# EAGLE board MicroRC-C (EAGLE 5.10), part 1 of 3
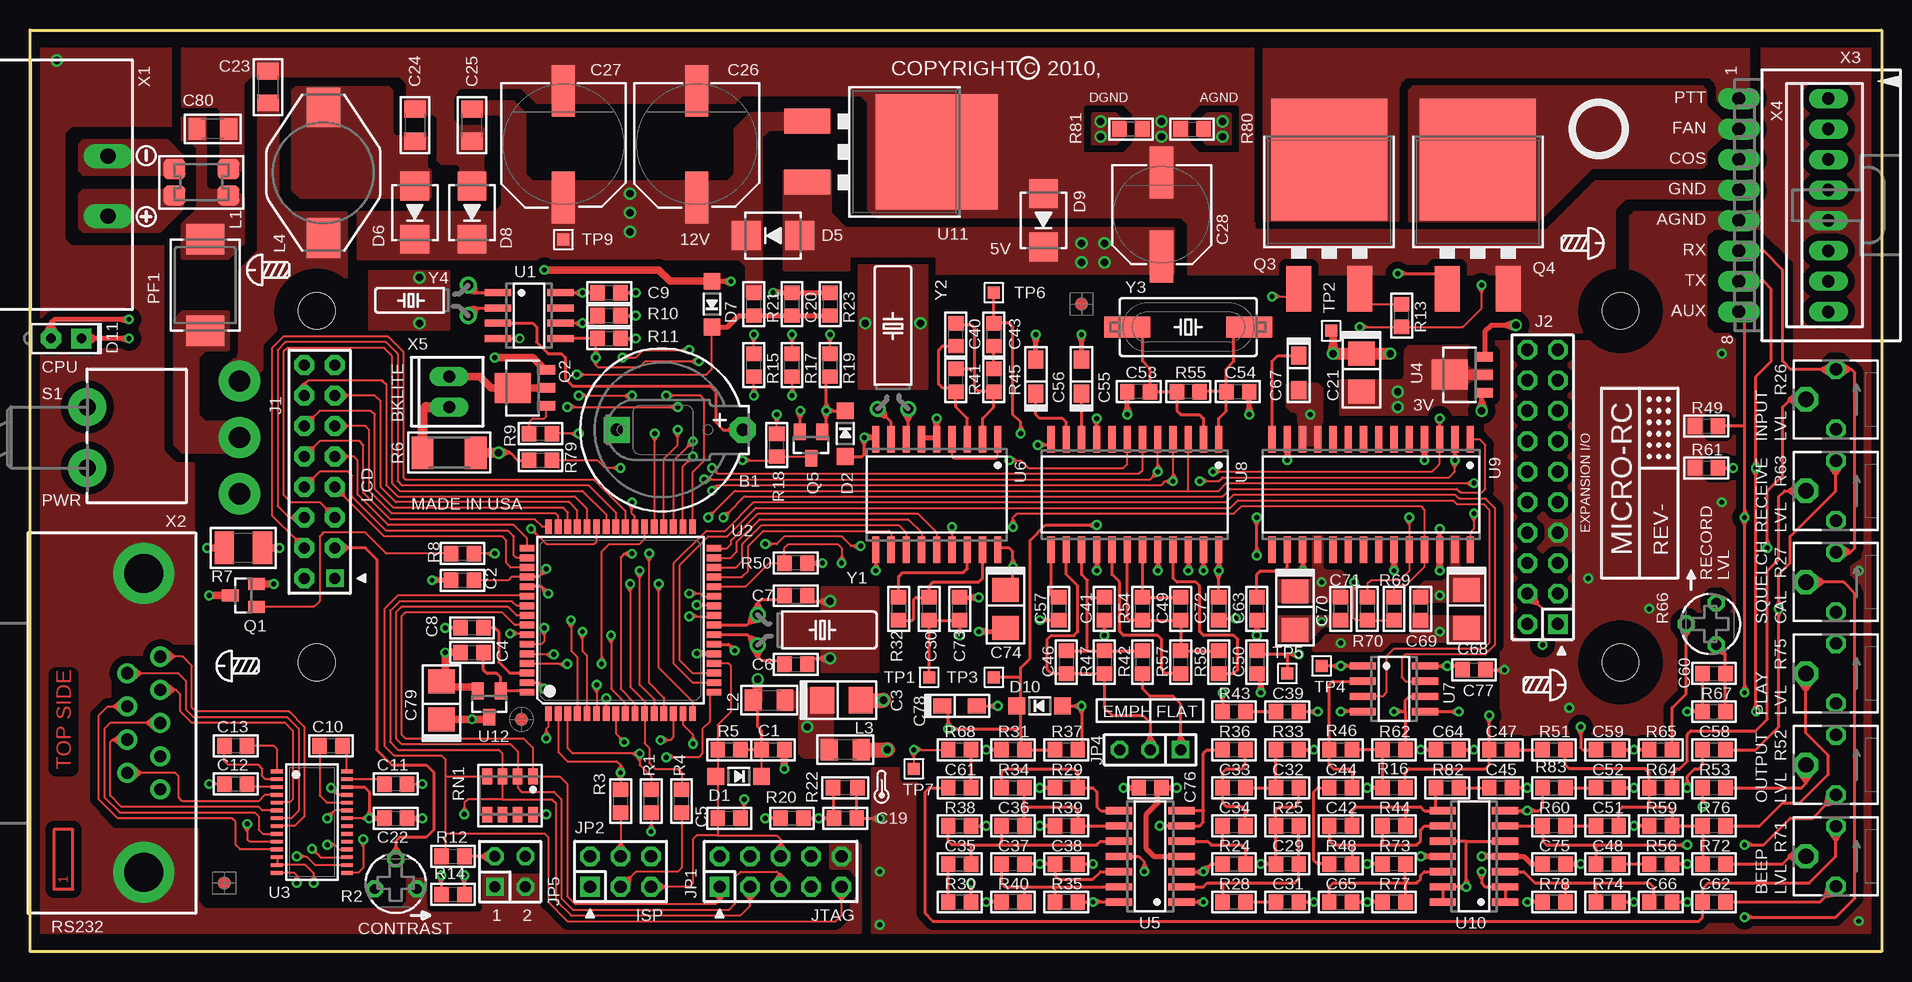
[diagram p0: board, top side]
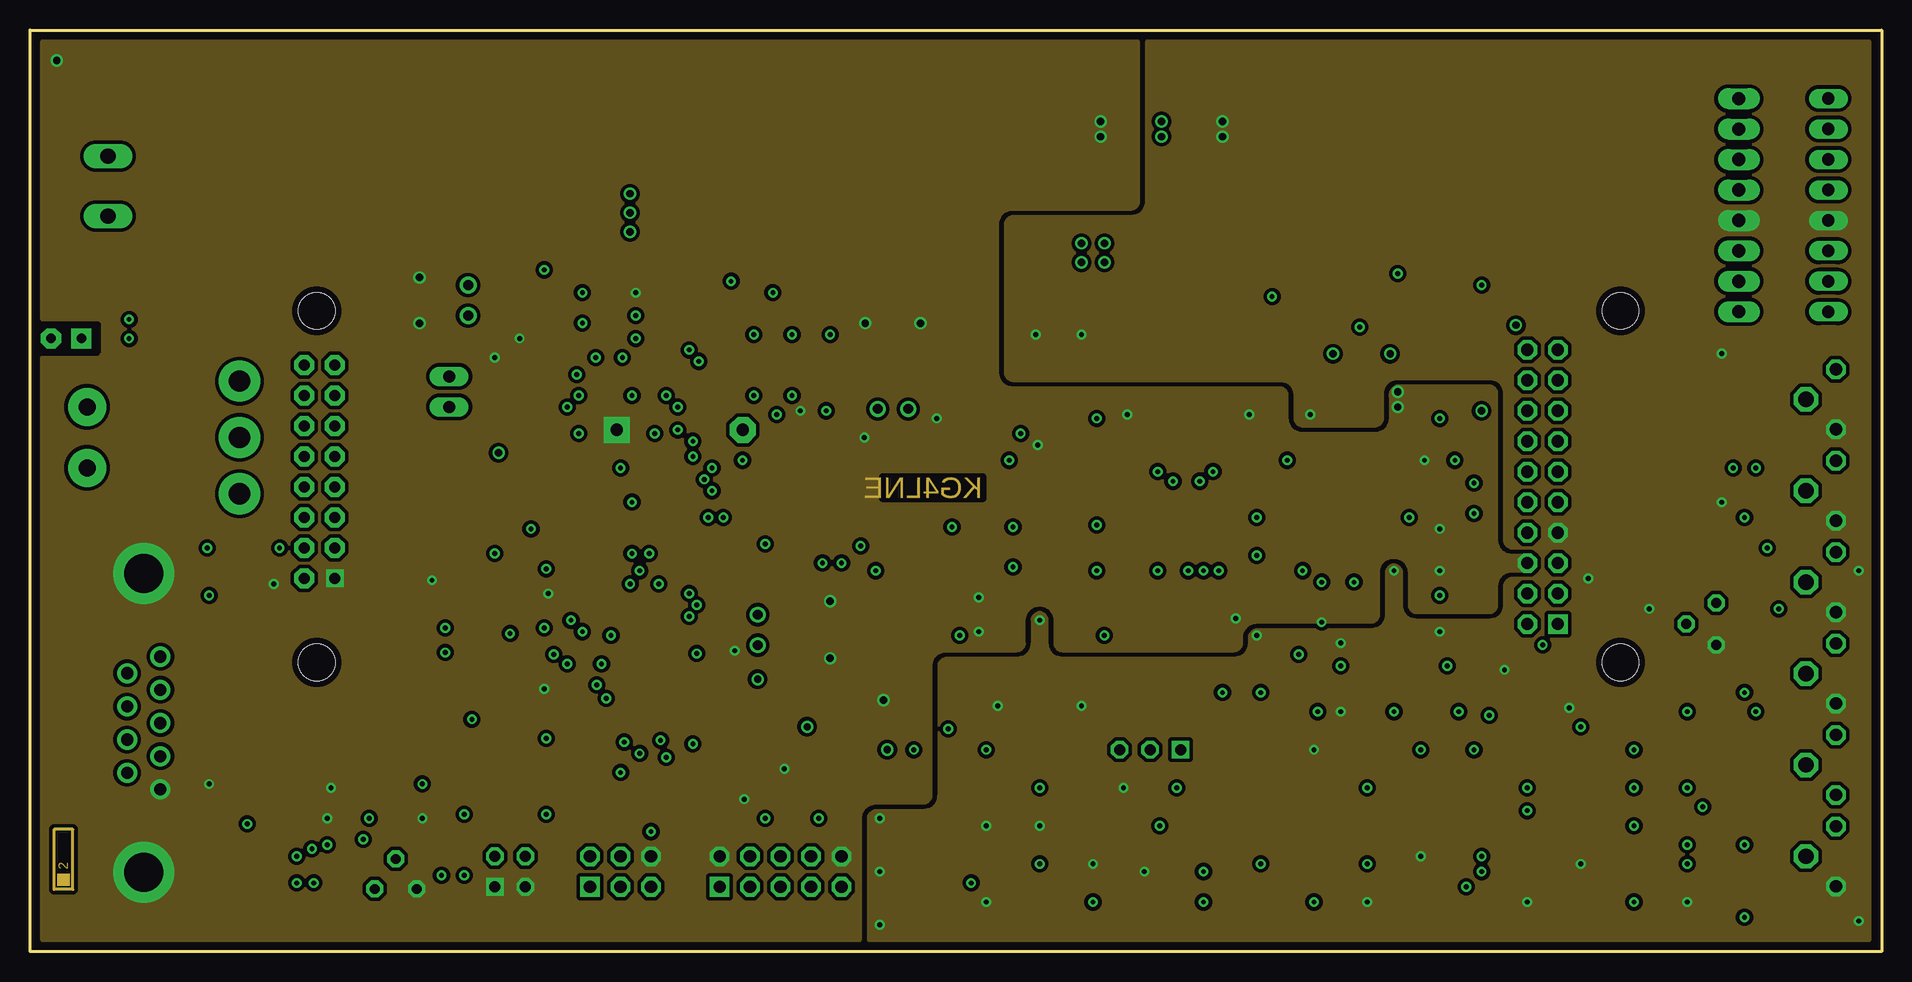
[diagram p1: board, inner layer GROUND]
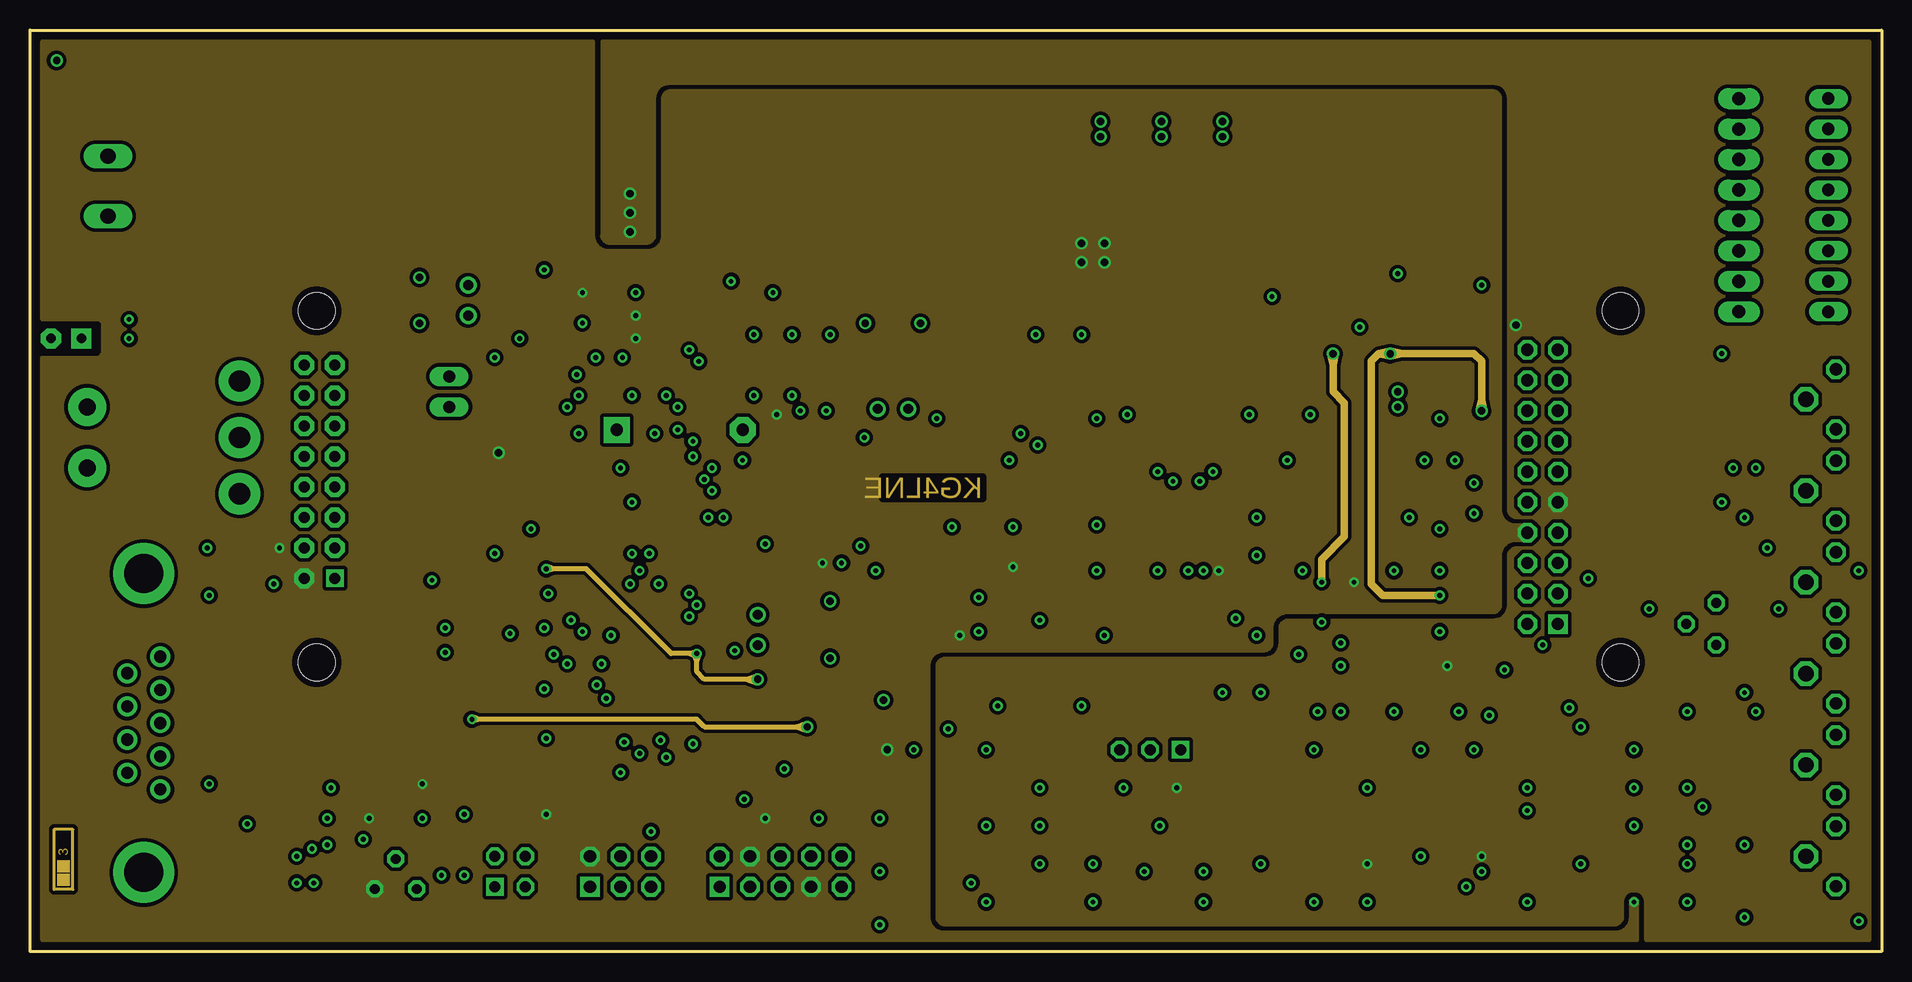
[diagram p2: board, inner layer SUPPLY]
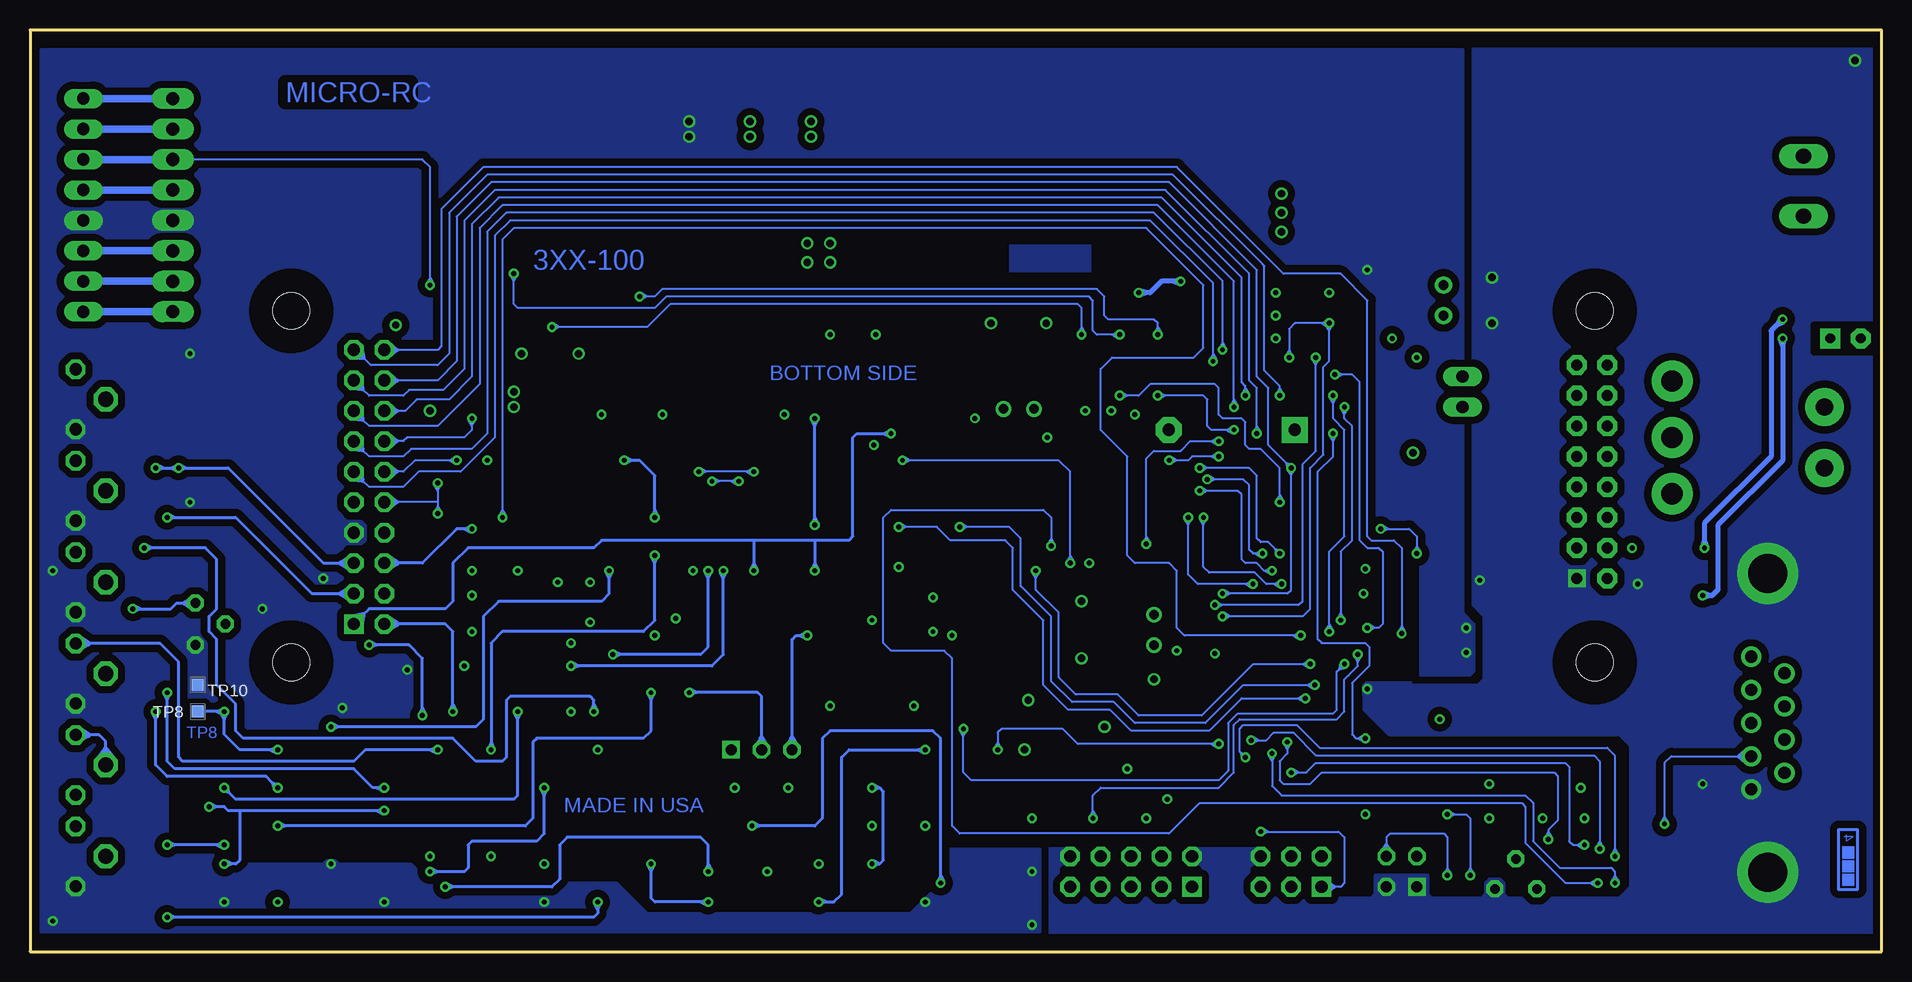
[diagram p3: board, bottom side, seen from below]

Size 154.31 x 76.83 mm. Coordinates in mm from the lower left corner, seen from the top.
Outline: 0,76.83 154.31,76.83 154.31,0 0,0 0,76.83
Copper layers (1*2+3*16): Top 0.035mm / dielectric 0.36mm / GROUND 0.035mm / dielectric 0.71mm / SUPPLY 0.035mm / dielectric 0.36mm / Bottom 0.035mm
Design rules "PRD_SN": minimum track width 2mil, minimum drill 16mil, track to track 8mil, track to pad 8mil, pad to pad 8mil, via to via 8mil, smd to smd 8mil, copper to edge 20mil, drill to drill 8mil, minimum pad ring 10mil, minimum via ring 8mil, stop-mask expansion 4mil, vias tented up to drill 32mil, thermal gap 24mil

## Footprints (pad centres in the part's own frame; a part is rotated, then mirrored left to right if it is on the bottom)
BR1225 = drill 1.016 pad 2.159 octagon: + 5.75,0 | drill 1.016 pad 2.159 square: - -4.75,0
C0805 = smd 1.2 x 1.3: 1 -0.953,0; 2 0.953,0
C3528/T = smd 2 x 2.2: + 1.587,0; - -1.587,0
C1206 = smd 1.4 x 1.8: 1 -1.329,0; 2 1.329,0
CSV-G = smd 4.318 x 1.93: + -4.445,0; - 4.445,0
CSV-E/F = smd 4.318 x 1.93: + -3.493,0; - 3.493,0
C3216/T = smd 1.5 x 1.27: + 1.429,0; - -1.429,0
SOD123 = smd 1.4 x 1.4: A 1.905,0; C -1.905,0
SMB = smd 2.4 x 2.4: A 2.223,0; C -2.223,0
LED535 = drill 0.813 pad 1.676 octagon: A -1.27,0 | drill 0.813 pad 1.676 square: K 1.27,0
DMC20261 = drill 0.914 pad 1.422 square: 1 2.54,-7.62 | drill 0.914 pad 1.676 octagon: 2 0,-7.62; 3 2.54,-5.08; 4 0,-5.08; 5 2.54,-2.54; 6 0,-2.54; 7 2.54,0; 8 0,0; 9 2.54,2.54; 10 0,2.54; 11 2.54,5.08; 12 0,5.08; 13 2.54,7.62; 14 0,7.62; 15 2.54,10.16; 16 0,10.16 | hole 3.048: 1.039,14.683; 1.039,-14.635; 109.674,-14.635; 109.674,14.682
MA10-2 = drill 1.016 square: 1 -11.43,-1.27 | drill 1.016 octagon: 2 -11.43,1.27; 3 -8.89,-1.27; 4 -8.89,1.27; 5 -6.35,-1.27; 6 -6.35,1.27; 7 -3.81,-1.27; 8 -3.81,1.27; 9 -1.27,-1.27; 10 -1.27,1.27; 11 1.27,-1.27; 12 1.27,1.27; 13 3.81,-1.27; 14 3.81,1.27; 15 6.35,-1.27; 16 6.35,1.27; 17 8.89,-1.27; 18 8.89,1.27; 19 11.43,-1.27; 20 11.43,1.27
AVR-JTAG-10 = drill 1.016 square: 1 -5.08,-1.27 | drill 1.016 octagon: 2 -5.08,1.27; 3 -2.54,-1.27; 4 -2.54,1.27; 5 0,-1.27; 6 0,1.27; 7 2.54,-1.27; 8 2.54,1.27; 9 5.08,-1.27; 10 5.08,1.27
AVR-ISP-6 = drill 1.016 square: 1 -2.54,-1.27 | drill 1.016 octagon: 2 -2.54,1.27; 3 0,-1.27; 4 0,1.27; 5 2.54,-1.27; 6 2.54,1.27
JP2 = drill 0.914 square: 1 -2.54,0 | drill 0.914 octagon: 2 0,0; 3 2.54,0
JP2Q = drill 0.914 square: 1 -1.27,-1.27 | drill 0.914 octagon: 2 -1.27,1.27; 3 1.27,-1.27; 4 1.27,1.27
CM1812 = smd 1.841 x 1.689: 1 -2.25,1.1; 2 -2.25,-1.1; 3 2.25,-1.1; 4 2.25,1.1
L1206 = smd 1.4 x 1.8: 1 -1.329,0; 2 1.329,0
PM-13 = smd 3.302 x 2.794: 1 -5.447,0; 2 5.447,0
SMD-7555 = smd 2.54 x 3.175: 1 -3.81,0; 2 3.81,0
SOT23@1 = smd 1 x 1.4: 1 -0.95,-1.1; 2 0.95,-1.1; 3 0,1.1
SOT89 = smd 0.8 x 1.5: 1 -1.5,-1.75; 2 0,-1.75; 3 1.5,-1.75 | smd 2.5 x 3: 4 0,1.05
D2PAK = smd 2.08 x 3.81: 1 -2.54,-8.255; 3 2.54,-8.255 | smd 9.652 x 10.16: 2 0,2.54
R0805 = smd 1.2 x 1.3: 1 -0.953,0; 2 0.953,0
EVM-L4G = drill 0.813 pad 1.422 octagon: 1 -1.75,-0.5; 2 0,2; 3 1.75,-0.5
R2010 = smd 1.8 x 2.7: 1 -2.223,0; 2 2.223,0
R1210 = smd 1.6 x 2.7: 1 -1.587,0; 2 1.587,0
R0805' = smd 1.2 x 1.3: 1 -1.016,0; 2 1.016,0
EVME-SIDE = drill 1.016 octagon: 1 -2.5,0; 3 2.5,0 | drill 1.27 octagon: 2 0,2.5
744-8 = smd 0.8 x 1.3: 1 -1.905,-1.587; 2 -0.635,-1.587; 3 0.635,-1.587; 4 1.905,-1.587; 5 1.905,1.587; 6 0.635,1.587; 7 -0.635,1.587; 8 -1.905,1.587
CK-A = drill 1.778 pad 3.429 round: 1 8.89,-4.699; 2 8.89,0; 3 8.89,4.699 | drill 1.422 pad 3.175 round: B1 -3.81,-2.54; B2 -3.81,2.54
TP10SQ = smd 1 x 1: TP 0,0
SMD-10SN = smd 1 x 1: TP 0,0
SO08 = smd 0.6 x 2.2: 1 -1.905,-2.6; 2 -0.635,-2.6; 3 0.635,-2.6; 4 1.905,-2.6; 5 1.905,2.6; 6 0.635,2.6; 7 -0.635,2.6; 8 -1.905,2.6
TQFP64-AEB = smd 1.194 x 0.559: 1 -7.8,6; 2 -7.8,5.2; 3 -7.8,4.4; 4 -7.8,3.6; 5 -7.8,2.8; 6 -7.8,2; 7 -7.8,1.2; 8 -7.8,0.4; 9 -7.8,-0.4; 10 -7.8,-1.2; 11 -7.8,-2; 12 -7.8,-2.8; 13 -7.8,-3.6; 14 -7.8,-4.4; 15 -7.8,-5.2; 16 -7.8,-6; 33 7.8,-6; 34 7.8,-5.2; 35 7.8,-4.4; 36 7.8,-3.6; 37 7.8,-2.8; 38 7.8,-2; 39 7.8,-1.2; 40 7.8,-0.4; 41 7.8,0.4; 42 7.8,1.2; 43 7.8,2; 44 7.8,2.8; 45 7.8,3.6; 46 7.8,4.4; 47 7.8,5.2; 48 7.8,6 | smd 0.559 x 1.194: 17 -6,-7.8; 18 -5.2,-7.8; 19 -4.4,-7.8; 20 -3.6,-7.8; 21 -2.8,-7.8; 22 -2,-7.8; 23 -1.2,-7.8; 24 -0.4,-7.8; 25 0.4,-7.8; 26 1.2,-7.8; 27 2,-7.8; 28 2.8,-7.8; 29 3.6,-7.8; 30 4.4,-7.8; 31 5.2,-7.8; 32 6,-7.8; 49 6,7.8; 50 5.2,7.8; 51 4.4,7.8; 52 3.6,7.8; 53 2.8,7.8; 54 2,7.8; 55 1.2,7.8; 56 0.4,7.8; 57 -0.4,7.8; 58 -1.2,7.8; 59 -2,7.8; 60 -2.8,7.8; 61 -3.6,7.8; 62 -4.4,7.8; 63 -5.2,7.8; 64 -6,7.8
TSSOP28 = smd 0.305 x 0.991: 1 -4.225,-2.918; 2 -3.575,-2.918; 3 -2.925,-2.918; 4 -2.275,-2.918; 5 -1.625,-2.918; 6 -0.975,-2.918; 7 -0.325,-2.918; 8 0.325,-2.918; 9 0.975,-2.918; 10 1.625,-2.918; 11 2.275,-2.918; 12 2.925,-2.918; 13 3.575,-2.918; 14 4.225,-2.918; 15 4.225,2.918; 16 3.575,2.918; 17 2.925,2.918; 18 2.275,2.918; 19 1.625,2.918; 20 0.975,2.918; 21 0.325,2.918; 22 -0.325,2.918; 23 -0.975,2.918; 24 -1.625,2.918; 25 -2.275,2.918; 26 -2.925,2.918; 27 -3.575,2.918; 28 -4.225,2.918
SOT89-4 = smd 0.8 x 1.5: 1 -1.5,-1.75; 2 0,-1.75; 3 1.5,-1.75 | smd 2.5 x 3: 4 0,1.05
SO14 = smd 0.6 x 2.2: 1 -3.81,-2.6; 2 -2.54,-2.6; 3 -1.27,-2.6; 4 0,-2.6; 5 1.27,-2.6; 6 2.54,-2.6; 7 3.81,-2.6; 8 3.81,2.6; 9 2.54,2.6; 10 1.27,2.6; 11 0,2.6; 12 -1.27,2.6; 13 -2.54,2.6; 14 -3.81,2.6
SO18W = smd 0.6 x 2.2: 1 -5.08,-4.6; 2 -3.81,-4.6; 3 -2.54,-4.6; 4 -1.27,-4.6; 5 0,-4.6; 6 1.27,-4.6; 7 2.54,-4.6; 8 3.81,-4.6; 9 5.08,-4.6; 10 5.08,4.6; 11 3.81,4.6; 12 2.54,4.6; 13 1.27,4.6; 14 0,4.6; 15 -1.27,4.6; 16 -2.54,4.6; 17 -3.81,4.6; 18 -5.08,4.6
SO24W = smd 0.6 x 2.2: 1 -6.985,-4.6; 2 -5.715,-4.6; 3 -4.445,-4.6; 4 -3.175,-4.6; 5 -1.905,-4.6; 6 -0.635,-4.6; 7 0.635,-4.6; 8 1.905,-4.6; 9 3.175,-4.6; 10 4.445,-4.6; 11 5.715,-4.6; 12 6.985,-4.6; 13 6.985,4.6; 14 5.715,4.6; 15 4.445,4.6; 16 3.175,4.6; 17 1.905,4.6; 18 0.635,4.6; 19 -0.635,4.6; 20 -1.905,4.6; 21 -3.175,4.6; 22 -4.445,4.6; 23 -5.715,4.6; 24 -6.985,4.6
SO28W = smd 0.6 x 2.2: 1 -8.255,-4.6; 2 -6.985,-4.6; 3 -5.715,-4.6; 4 -4.445,-4.6; 5 -3.175,-4.6; 6 -1.905,-4.6; 7 -0.635,-4.6; 8 0.635,-4.6; 9 1.905,-4.6; 10 3.175,-4.6; 11 4.445,-4.6; 12 5.715,-4.6; 13 6.985,-4.6; 14 8.255,-4.6; 15 8.255,4.6; 16 6.985,4.6; 17 5.715,4.6; 18 4.445,4.6; 19 3.175,4.6; 20 1.905,4.6; 21 0.635,4.6; 22 -0.635,4.6; 23 -1.905,4.6; 24 -3.175,4.6; 25 -4.445,4.6; 26 -5.715,4.6; 27 -6.985,4.6; 28 -8.255,4.6
SOT23 = smd 1 x 1.4: 1 -0.95,-1.1; 2 0.95,-1.1; 3 0,1.1
951-2 = drill 1.27 pad 1.93 long: 1 -2.5,0; 2 2.5,0
NC182M9 = drill 1.016 pad 1.676 round: 1 -5.537,2.769; 2 -2.769,2.769; 3 0,2.769; 4 2.769,2.769; 5 5.537,2.769; 6 -4.153,0; 7 -1.384,0; 8 1.384,0; 9 4.153,0 | drill 3.251 pad 5.08 round: G1 12.459,1.384; G2 -12.459,1.384
70553-08 = drill 1.092 long: 1 -8.89,-7.62; 2 -6.35,-7.62; 3 -3.81,-7.62; 4 -1.27,-7.62; 5 1.27,-7.62; 6 3.81,-7.62; 7 6.35,-7.62; 8 8.89,-7.62
MTA08-100 = drill 1.016 long: 1 8.89,0; 2 6.35,0; 3 3.81,0; 4 1.27,0; 5 -1.27,0; 6 -3.81,0; 7 -6.35,0; 8 -8.89,0
MTA-100-2V = drill 1.016 long: 1 -1.27,0; 2 1.27,0
TC38H = drill 0.813 round: 1 -1.27,0; 2 1.27,0
TC310H = drill 0.813 round: 1 -1.27,0; 2 1.27,0
SM49 = smd 3.81 x 1.778: 1 -5.08,0; 2 5.08,0
TC26H = drill 0.813 pad 1.422 round: 1 -1.27,0; 2 1.27,0

## Placement (x,y rotation side)
B1  BR1225A/HB  [BR1225]  53.66,43.5 0 top
C1  1uF  [C0805]  61.91,16.83 0 top
C2  0.1uF  [C0805]  36.04,30.96 180 top
C3  10uF  [C3528/T]  67.63,20.95 180 top
C4  10uF  [C0805]  36.83,24.92 0 top
C5  0.01uF  [C0805]  58.26,11.11 0 top
C6  22pF  [C0805]  63.82,23.95 0 top
C7  22pF  [C0805]  63.82,29.67 0 top
C8  0.1uF  [C0805]  36.83,26.99 180 top
C9  0.1uF  [C0805]  48.26,54.93 0 top
C10  0.1uF  [C0805]  25.08,17.14 180 top
C11  0.47uF  [C0805]  30.48,13.97 180 top
C12  0.47uF  [C0805]  17.14,13.97 0 top
C13  0.47uF  [C0805]  17.14,17.14 180 top
C19  0.1uF  [C0805]  67.94,11.11 0 top
C20  0.1uF  [C0805]  63.5,53.97 90 top
C21  10uF  [C3528/T]  110.97,48.26 90 top
C22  1uF  [C0805]  30.48,11.11 0 top
C23  0.1uF  [C1206]  19.84,72.07 90 top
C24  0.1uF  [C1206]  32.07,68.9 90 top
C25  0.1uF  [C1206]  36.83,68.9 270 top
C26  470uF  [CSV-G]  55.56,67.31 90 top
C27  470uF  [CSV-G]  44.45,67.31 90 top
C28  100uF  [CSV-E/F]  94.3,61.44 90 top
C29  100pF  [C0805]  104.78,7.3 180 top
C30  0.1uF  [C0805]  74.93,28.57 270 top
C31  0.1uF  [C0805]  104.78,4.13 180 top
C32  1500pF  [C0805]  104.78,13.65 180 top
C33  1500pF  [C0805]  100.33,13.65 180 top
C34  1500pF  [C0805]  100.33,10.48 180 top
C35  0.047uF  [C0805]  77.47,7.3 0 top
C36  470pF  [C0805]  81.92,10.48 0 top
C37  470pF  [C0805]  81.92,7.3 180 top
C38  0.047uF  [C0805]  86.36,7.3 180 top
C39  1uF  [C0805]  104.78,20 0 top
C40  0.001uF  [C0805]  77.15,51.43 90 top
C41  0.0068uF  [C0805]  89.53,28.57 270 top
C42  1500pF  [C0805]  109.22,10.48 0 top
C43  0.1uF  [C0805]  80.33,51.43 270 top
C44  1uF  [C0805]  109.22,13.65 180 top
C45  1uF  [C0805]  122.56,13.65 0 top
C46  100pF  [C0805]  86.36,24.13 270 top
C47  1uF  [C0805]  122.56,16.83 0 top
C48  560pF  [C0805]  131.44,7.3 0 top
C49  100pF  [C0805]  95.89,28.57 90 top
C50  1uF  [C0805]  102.23,24.13 270 top
C51  10uF  [C0805]  131.44,10.48 180 top
C52  1uF  [C0805]  131.44,13.65 0 top
C53  33pF  [C0805]  92.39,46.67 180 top
C54  33pF  [C0805]  100.65,46.67 0 top
C55  0.1uF  [C3216/T]  87.63,47.94 270 top
C56  2.2uF  [C3216/T]  83.82,47.94 270 top
C57  0.1uF  [C0805]  85.72,28.57 270 top
C58  1uF  [C0805]  140.34,16.83 0 top
C59  1uF  [C0805]  131.44,16.83 180 top
C60  4700pF  [C0805]  140.34,23.18 0 top
C61  1uF  [C0805]  77.47,13.65 180 top
C62  0.001uF  [C0805]  140.34,4.13 0 top
C63  0.1uF  [C0805]  102.23,28.57 90 top
C64  1uF  [C0805]  118.11,16.83 0 top
C65  1uF  [C0805]  109.22,4.13 0 top
C66  1uF  [C0805]  135.89,4.13 0 top
C67  1uF  [C3216/T]  105.73,48.26 90 top
C68  22uF  [C3528/T]  119.7,28.57 90 top
C69  0.1uF  [C0805]  115.89,28.57 270 top
C70  22uF  [C3528/T]  105.41,28.42 90 top
C71  0.1uF  [C0805]  109.22,28.57 270 top
C72  0.1uF  [C0805]  99.06,28.57 270 top
C73  0.1uF  [C0805]  77.47,28.57 90 top
C74  22uF  [C3528/T]  81.28,28.57 90 top
C75  0.1uF  [C0805]  127,7.3 0 top
C76  0.1uF  [C0805]  93.34,13.65 180 top
C77  0.1uF  [C0805]  120.33,23.49 0 top
C78  0.1uF  [C3216/T]  77.47,20.48 180 top
C79  10uF  [C3528/T]  34.29,20.96 270 top
C80  0.01uF  [C1206]  15.24,68.58 0 top
D1  BAV16W-7-F  [SOD123]  59.05,14.6 180 top
D2  5.1V  [SOD123]  67.94,43.18 270 top
D5  S1GB-13  [SMB]  61.91,59.69 0 top
D6  S1GB-13  [SMB]  32.07,61.59 90 top
D7  BZT52C5V1-7-F  [SOD123]  56.83,53.97 90 top
D8  18V  [SMB]  36.83,61.59 90 top
D9  S1GB-13  [SMB]  84.45,60.96 90 top
D10  BZT52C5V1-7-F  [SOD123]  84.14,20.48 0 top
D11  RED  [LED535]  3.02,51.12 0 top
FIDUCIAL1  FIDUCIAL-G10S  [G10S]  16.19,5.71 0 top
FIDUCIAL2  FIDUCIAL-G10S  [G10S]  87.63,53.97 0 top
FIDUCIAL3  FIDUCIAL-G10  [G10]  40.96,19.37 0 top
J1  DMC20261  [DMC20261]  22.86,38.73 0 top
J2  [MA10-2]  126.05,38.73 90 top
JP1  AVR-JTAG-10  [AVR-JTAG-10]  62.55,6.67 0 top
JP2  AVR-ISP-6  [AVR-ISP-6]  49.21,6.67 0 top
JP4  [JP2]  93.34,16.83 180 top
JP5  [JP2Q]  40.01,6.67 0 top
L1  CM1812  [CM1812]  14.29,64.13 0 top
L2  0.1uH  [L1206]  61.59,20.95 180 top
L3  FB-M1331  [L1206]  67.94,16.83 0 top
L4  10uH  [PM-13]  24.45,64.93 90 top
PF1  MF-SM030-2  [SMD-7555]  14.61,55.56 270 top
Q1  MMBTA05LT1G  [SOT23@1]  17.78,29.69 90 top
Q2  ZXMN6A07Z  [SOT89]  41.27,46.99 90 top
Q3  IRF614SPBF  [D2PAK]  108.27,63.5 0 top
Q4  IRF614SPBF  [D2PAK]  120.65,63.5 0 top
Q5  MMBTA05LT1G  [SOT23@1]  65.09,42.23 180 top
R1  47.5R  [R0805]  51.75,12.54 90 top
R2  10K  [EVM-L4G]  30.48,5.71 0 top
R3  47.5R  [R0805]  49.21,12.54 90 top
R4  47.5R  [R0805]  54.29,12.54 90 top
R5  10K  [R0805]  58.26,16.83 0 top
R6  48.7R  [R2010]  34.92,41.59 180 top
R7  464R  [R1210]  17.78,33.65 180 top
R8  4.75K  [R0805]  36.04,33.18 180 top
R9  4.75K  [R0805]  42.55,43.18 180 top
R10  10K  [R0805]  48.26,53.02 0 top
R11  10K  [R0805]  48.26,51.12 0 top
R12  47.5R  [R0805]  35.24,7.94 0 top
R13  100K  [R0805]  114.3,53.02 90 top
R14  47.5R  [R0805]  35.24,4.76 0 top
R15  4.75K  [R0805]  60.33,48.89 90 top
R16  1M  [R0805]  113.67,13.65 180 top
R17  4.75K  [R0805]  63.5,48.89 90 top
R18  10K  [R0805]  62.23,42.23 90 top
R19  4.75K  [R0805]  66.67,48.89 90 top
R20  100K  [R0805]  63.5,11.11 180 top
R21  62K  [R0805]  60.33,53.97 90 top
R22  NCP21WF104J03RA  [R0805']  67.94,13.65 180 top
R23  22K  [R0805]  66.67,53.97 270 top
R24  91.0K  [R0805]  100.33,7.3 0 top
R25  10K  [R0805]  104.78,10.48 180 top
R26  10K  [EVME-SIDE]  150.5,46.04 90 top
R27  10K  [EVME-SIDE]  150.5,30.8 90 top
R28  10K  [R0805]  100.33,4.13 180 top
R29  332K  [R0805]  86.36,13.65 0 top
R30  4.75K  [R0805]  77.47,4.13 0 top
R31  22K  [R0805]  81.92,16.83 180 top
R32  301K  [R0805]  72.39,28.57 270 top
R33  4.75K  [R0805]  104.78,16.83 180 top
R34  100K  [R0805]  81.92,13.65 0 top
R35  150K  [R0805]  86.36,4.13 180 top
R36  5.62K  [R0805]  100.33,16.83 180 top
R37  100K  [R0805]  86.36,16.83 0 top
R38  8.25K  [R0805]  77.47,10.48 0 top
R39  10K  [R0805]  86.36,10.48 180 top
R40  10K  [R0805]  81.92,4.13 180 top
R41  100K  [R0805]  77.15,47.62 90 top
R42  11.3K  [R0805]  92.71,24.13 270 top
R43  10K  [R0805]  100.33,20 0 top
R44  22K  [R0805]  113.67,10.48 0 top
R45  100K  [R0805]  80.33,47.62 270 top
R46  1M  [R0805]  109.22,16.83 0 top
R47  93.1K  [R0805]  89.53,24.13 270 top
R48  22K  [R0805]  109.22,7.3 0 top
R49  100K  [R0805]  139.7,43.81 0 top
R50  10K  [R0805]  63.82,32.38 180 top
R51  22K  [R0805]  127,16.83 0 top
R52  200K  [EVME-SIDE]  150.5,15.56 90 top
R53  33.2K  [R0805]  140.34,13.65 180 top
R54  10K  [R0805]  92.71,28.57 90 top
R55  1M  [R0805]  96.52,46.67 180 top
R56  10K  [R0805]  135.89,7.3 0 top
R57  10K  [R0805]  95.89,24.13 90 top
R58  10K  [R0805]  99.06,24.13 90 top
R59  22K  [R0805]  135.89,10.48 0 top
R60  33.2K  [R0805]  127,10.48 180 top
R61  100K  [R0805]  139.7,40.32 0 top
R62  1M  [R0805]  113.67,16.83 180 top
R63  10K  [EVME-SIDE]  150.5,38.42 90 top
R64  22K  [R0805]  135.89,13.65 180 top
R65  10K  [R0805]  135.89,16.83 0 top
R66  10K  [EVM-L4G]  140.02,27.3 90 top
R67  10K  [R0805]  140.34,20 0 top
R68  100K  [R0805]  77.47,16.83 0 top
R69  10K  [R0805]  113.67,28.57 270 top
R70  10K  [R0805]  111.44,28.57 270 top
R71  10K  [EVME-SIDE]  150.5,7.94 90 top
R72  22K  [R0805]  140.34,7.3 0 top
R73  100K  [R0805]  113.67,7.3 180 top
R74  100K  [R0805]  131.44,4.13 0 top
R75  10K  [EVME-SIDE]  150.5,23.18 90 top
R76  22K  [R0805]  140.34,10.48 180 top
R77  100K  [R0805]  113.67,4.13 0 top
R78  100K  [R0805]  127,4.13 0 top
R79  10K  [R0805]  42.55,40.96 180 top
R80  0R  [R0805]  96.84,68.58 0 top
R81  0R  [R0805]  91.76,68.58 180 top
R82  1.00K  [R0805]  118.11,13.65 0 top
R83  1.00K  [R0805]  127,13.65 0 top
RN1  10K  [744-8]  40.01,13.02 180 top
S1  CK-A  [CK-A]  8.57,42.86 0 top
TP1  TPTP10SQ  [TP10SQ]  74.93,22.86 270 top
TP2  TPTP10SQ  [TP10SQ]  108.43,51.75 180 top
TP3  TPTP10SQ  [TP10SQ]  80.33,22.86 270 top
TP4  TPTP10SQ  [TP10SQ]  107.63,23.81 90 top
TP5  TPTP10SQ  [TP10SQ]  104.78,23.18 90 top
TP6  TPTP10SQ  [TP10SQ]  80.33,54.93 90 top
TP7  TPTP10SQ  [TP10SQ]  73.66,15.24 270 top
TP8  TPS-SMD-10SN  [SMD-10SN]  140.34,20 180 bottom
TP9  TPTP10SQ  [TP10SQ]  44.45,59.37 0 top
TP10  TPS-SMD-10SN  [SMD-10SN]  140.34,22.22 180 bottom
U1  DS1307Z  [SO08]  41.59,53.02 270 top
U2  MEGA1281/2561  [TQFP64-AEB]  49.21,27.62 90 top
U3  MAX3243IPWR  [TSSOP28]  23.5,10.79 270 top
U4  L78L33ACUTR  [SOT89-4]  119.38,48.1 90 top
U5  LM324D  [SO14]  93.34,7.94 90 top
U6  CM8870CS  [SO18W]  75.56,38.1 180 top
U7  MAX323CSA  [SO08]  113.67,21.91 270 top
U8  MX828DW  [SO24W]  92.08,38.1 180 top
U9  ISD4002S  [SO28W]  111.76,38.1 180 top
U10  TL084D  [SO14]  120.33,7.94 90 top
U11  L7805ACD2T  [D2PAK]  73.03,66.67 270 top
U12  AD158X  [SOT23]  38.26,20.64 180 top
U$6  [ICON_ATTR_COPYRIGHT]  71.75,73.02 0 top
U$7  [LAYER_CHECK-4]  3.17,5.71 90 top
U$60  [FIELD_ATTR_DATECODE5_RESTRICT]  72.07,57.15 0 bottom
U$74  [ICON_SIDE_BOTTOM]  92.71,47.62 0 top
U$75  [ICON_SIDE_TOP]  3.43,15.18 90 top
U$100  [ICON_ATTR_REV-M]  130.81,68.58 0 top
U$112  [ICON_TEMP]  70.96,13.02 0 top
U$123  [ICON_MINUS]  9.68,66.36 90 top
U$125  [ICON_PLUS]  9.68,61.28 0 top
U$133  [ICON_MSCREW-S]  129.86,59.05 270 top
U$230  [ICON_PIN1_B]  127.64,25.4 270 top
U$235  [ICON_PIN1_B]  27.3,31.11 0 top
U$239  [ICON_MSCREW-S]  126.68,22.22 270 top
U$240  [ICON_ARROW-T]  33.34,3.02 270 top
U$241  [ICON_ARROW-T]  138.43,31.75 0 top
U$280  [ICON_PIN1_B]  46.67,3.49 270 top
U$281  [ICON_PIN1_B]  57.47,3.49 270 top
U$282  [ICON_MSCREW-S]  16.83,23.81 90 top
U$283  [ICON_MSCREW-S]  19.37,56.83 90 top
X1  EDSTLZ951/2  [951-2]  6.51,63.82 270 top
X2  182-009-112-531  [NC182M9]  8.1,19.05 270 top
X3  70553-0007  [70553-08]  150.02,62.23 270 top
X4  640454-8  [MTA08-100]  149.86,62.23 90 top
X5  640454-2  [MTA-100-2V]  34.92,46.67 90 top
Y1  16.000 MHz  [TC38H]  60.64,26.81 270 top
Y2  3.579 MHZ  [TC310H]  71.91,45.24 0 top
Y3  4.032MHZ  [SM49]  96.52,52.07 0 top
Y4  32.678 kHz  [TC26H]  36.51,54.29 90 top

## Library data of the parts
B1 = battery; DNP: T; PARTNO: BR1225A/HB; PLACE: INSTALL ON PURCHASE
C1 C22 C39 C44 C45 C47 C50 C52 C58 C59 C61 C64-C66 = rc-master; PARTNO: C0805C105Z3VACTU
C2 C8-C10 C19 C20 C30 C31 C43 C57 C63 C69 C71-C73 C75-C77 = rc-master; PARTNO: C0805F104K5RACTU
C3 C21 C79 = rc-master; PARTNO: T491B106M016AT; TYPE: TANT; VOLT: 16V
C4 C51 = rc-master; PARTNO: C0805C106K9PACTU
C5 = rc-master; PARTNO: C0805C103K5RACTU
C6 C7 = rc-master; PARTNO: C0805C220J5GACTU
C11-C13 = rc-master; PARTNO: C0805F474K3RACTU
C23-C25 = rc-master; PARTNO: C1206C104K5RACTU
C26 C27 = rc-master; PARTNO: EEE-1EA471P; VOLT: 25V
C28 = rc-master; PARTNO: EEE-1CA101P; VOLT: 16V
C29 C46 C49 = rc-master; PARTNO: C0805C101J5GACTU
C32-C34 C42 = rc-master; PARTNO: C0805C152K5RACTU
C35 C38 = rc-master; PARTNO: C0805C473K5RACTU
C36 C37 = rc-master; PARTNO: C0805C471J5GACTU
C40 C62 = rc-master; PARTNO: C0805C102K5RACTU
C41 = rc-master; PARTNO: C0805C682K5RACTU
C48 = rc-master; PARTNO: C0805C561J5GACTU
C53 C54 = rc-master; PARTNO: C0805C330J5GACTU
C55 = rc-master; PARTNO: T491A104K035AT
C56 = rc-master; PARTNO: T491A225K010AT
C60 = rc-master; PARTNO: C0805C472K5RACTU
C67 = rc-master; PARTNO: T491A105K016AT; TYPE: TANT
C68 C70 C74 = rc-master; PARTNO: T491B226M016AT; TYPE: TANT
C78 = rc-master; DNP: T; PARTNO: DNP; TYPE: TANT
C80 = rc-master; PARTNO: 12065C103KAT2A
D1 = diode; PARTNO: BAV16W-7-F
D2 = diode; PARTNO: BZT52C5V1-7-F
D5 D6 D9 = diode; PARTNO: RS1GB-13-F
D7 D10 = diode; PARTNO: BZT52C5V6-7-F
D8 = diode; PARTNO: 1SMB5931BT3G
D11 = led; PARTNO: 5350T5
FIDUCIAL1-FIDUCIAL3 = dfiducial; BOM: EXCLUDE
J1 = display-lcd; BOM: EXCLUDE; PARTNO: *
J2 = con-lstb; BOM: EXCLUDE; PARTNO: *
JP1 = atmel; BOM: EXCLUDE; PARTNO: *
JP2 = atmel; BOM: EXCLUDE
JP4 JP5 = jumper; BOM: EXCLUDE; PARTNO: *
L1 = inductor-steward; PARTNO: CM1812R600R-10
L2 = rc-master; PARTNO: PM1210-R10J
L3 = rc-master; PARTNO: PM2001-200
L4 = inductors-jwmiller; PARTNO: PM3308-100M
PF1 = fuse; PARTNO: MF-SM030-2; PARTNUM: MF-SM030-2
Q1 Q5 = transistor-npn; PARTNO: MMBTA05LT1G
Q2 = zetex; PARTNO: ZXMN6A07ZTA
Q3 Q4 = transistor-fet; PARTNO: IRF614SPBF
R1 R3 R4 R12 R14 = rc-master; PARTNO: ERJ-6ENF47R5V
R2 R66 = pot; PARTNO: EVM-L4GA00B14
R5 R10 R11 R18 R25 R28 R39 R40 R43 R50 R54 R56-R58 R65 R67 R69 R70 R79 = rc-master; PARTNO: ERJ-6ENF1002V
R6 = rc-master; PARTNO: ERJ-12SF48R7U; RATE: 1/2W
R7 = rc-master; PARTNO: ERJ-14NF4640U; RATE: 1/4W
R8 R9 R15 R17 R19 R30 R33 = rc-master; PARTNO: ERJ-6ENF4751V
R13 R20 R34 R37 R41 R45 R49 R61 R68 R73 R74 R77 R78 = rc-master; PARTNO: ERJ-6ENF1003V
R16 R46 R55 R62 = rc-master; PARTNO: ERJ-6ENF1004V
R21 = rc-master; PARTNO: ERJ-6ENF6192V
R22 = ptc-ntc; PARTNO: NCP21WF104J03RA
R23 R31 R44 R48 R51 R59 R64 R72 R76 = rc-master; PARTNO: ERJ-6ENF2212V
R24 = rc-master; PARTNO: ERJ-6ENF9092V
R26 R27 R63 R71 R75 = pot; PARTNO: EVM-EGGA00B14
R29 = rc-master; PARTNO: ERJ-6ENF3323V
R32 = rc-master; PARTNO: ERJ-6ENF3013V
R35 = rc-master; PARTNO: ERJ-6ENF1503V
R36 = rc-master; PARTNO: ERJ-6ENF5621V
R38 = rc-master; PARTNO: ERJ-6ENF8251V
R42 = rc-master; PARTNO: ERJ-6ENF1132V
R47 = rc-master; PARTNO: ERJ-6ENF9312V
R52 = pot; PARTNO: EVM-EGGA00B25
R53 R60 = rc-master; PARTNO: ERJ-6ENF3322V
R80 R81 = rc-master; PARTNO: RC0805JR-070RL
R82 R83 = rc-master; PARTNO: ERJ-6ENF1001V
RN1 = resistor-array; PARTNO: 744C083103JPTR
S1 = switch; PARTNO: 2M1-SP1-T2-B4-M6RE
TP1-TP7 TP9 = testpad; BOM: EXCLUDE
TP8 TP10 = testpoint; BOM: EXCLUDE
U1 = maxim; PARTNO: DS1307Z+
U2 = atmel; PARTNO: ATMEGA1281-16AU
U3 = maxim; PARTNO: MAX3243ECPWR
U4 = v-reg; PARTNO: L78L33ACUTR
U5 = linear; PARTNO: LM324D
U6 = linear; PARTNO: MT8870DS
U7 = maxim; PARTNO: MAX323CSA+
U8 = cml-micro; PARTNO: MX828DW
U9 = isd; PARTNO: ISD4002-240SY
U10 = linear; PARTNO: TLC084CD
U11 = v-reg; PARTNO: L7805ACD2T
U12 = v-reg; PARTNO: AD1584BRTZ-REEL7
U$6 U$60 U$74 U$75 U$100 U$112 U$123 U$125 U$133 U$230 U$235 U$239-U$241 U$280-U$283 = dicons
U$7 = dfiducial
X1 = con-ost; PARTNO: EDSTLZ951/2
X2 = con-subd; PARTNO: 182-009-113R531
X3 = con-hdrs40; PARTNO: 70553-0007; PLACE: POP X3 OR X4
X4 = con-amp; PARTNO: 640454-8; PLACE: POP X3 OR X4
X5 = con-hdrs40; PARTNO: 640454-2
Y1 = crystal; PARTNO: ECS-160-18-9X
Y2 = crystal; PARTNO: ECS-35-18-10X
Y3 = crystal; PARTNO: ECS-40.3-20-5PX-TR
Y4 = crystal; PARTNO: ECS-.327-12.5-13X

## Nets
+2V5: R16.2 R46.2 R62.2 U10.1 U10.2
+3V3: C21.+ C68.+ C69.1 C70.+ C71.1 TP2.TP U4.1 U9.18 U9.27
+5V: C9.1 C11.1 C22.1 C28.+ C30.2 C72.1 C73.1 C74.+ D5.A D9.C J1.2 J2.8 JP1.4 JP1.7 JP2.2 L3.2 R2.1 R6.1 R7.1 R10.2 R11.2 R18.2 R20.2 R50.1 R69.2 R70.2 R74.2 R79.2 RN1.5 RN1.6 RN1.7 RN1.8 TP1.TP U1.8 U3.22 U3.26 U6.18 U8.24 U11.3
+12V: C25.1 C26.+ C27.+ C75.1 C76.1 C77.1 D5.C D6.C D8.C J2.9 R21.2 R73.2 TP9.TP U4.3 U5.4 U7.8 U10.4 U11.1
AGND: C4.1 C8.2 C19.2 C20.2 C38.1 C55.- C56.- C57.2 C60.2 C62.2 C63.1 C65.2 C66.2 C67.- C68.- C69.2 C75.2 C76.2 C77.2 C78.- C79.- D7.A D10.A J2.7 R22.1 R23.1 R26.1 R27.1 R33.1 R37.2 R38.2 R39.2 R40.2 R49.1 R61.1 R63.1 R66.1 R67.2 R71.1 R75.1 R77.1 R78.1 R80.2 TP10.TP U5.11 U7.4 U9.11 U9.12 U9.23 U10.11 U12.2 X3.5 X4.5
AUX_AUDIO: C45.2 J2.3 R49.2 X3.8 X4.8
AUX_AUDIO_OUT: TP4.TP U7.1 U8.22
AVR_5V: C1.1 C2.1 D1.C L2.2 R5.2 U2.21 U2.52
AVR_REF: C4.2 U2.64 U12.1
B_CTS: U3.6 X2.8
B_DCD: U3.8 X2.1
B_DSR: U3.7 X2.6
B_DTR: U3.10 X2.4
B_RI: U3.4 X2.9
B_RTS: U3.11 X2.7
B_RXD: U3.5 X2.2
B_TXD: U3.9 X2.3
BEEP_PWM: R68.1 TP7.TP U2.15
CGND: C23.2 C24.2 C25.2 C26.- C27.- C28.- C80.2 D8.A D9.A L1.4 Q3.3 Q4.3 R13.2 R80.1 R81.1 U11.2 X3.4 X4.4
COM_CTS: U2.14 U3.17
COM_DCD: U2.8 U3.15
COM_DSR: U2.17 U3.16
COM_DTR: U2.35 U3.12 U3.13
COM_RXD: R3.2 U2.2 U3.18
COM_TXD: R1.2 U2.3 U3.14
COS: R13.1 R19.2 X3.3 X4.3
CS_DTMF: U2.38 U6.10
DISC_AUDIO: R26.3 R27.3 X3.6 X4.6
DTMF_Q1: U2.29 U6.11
DTMF_Q2: U2.30 U6.12
DTMF_Q3: U2.31 U6.13
DTMF_Q4: U2.32 U6.14
EXP_IO0: J2.15 U2.4
EXP_IO1: J2.19 U2.5
EXP_IO2: J2.17 U2.37
EXT_COS: Q5.3 R18.1 U2.34
FAN: Q4.2 X3.2 X4.2
FAN_DRIVE: R17.1 U2.39
GND: B1.- C1.2 C2.2 C3.- C5.2 C6.2 C7.2 C9.2 C12.1 C21.- C22.2 C53.2 C54.2 C70.- C71.2 C72.2 C73.2 C74.- D2.A J1.1 J2.6 JP1.2 JP1.10 JP2.6 JP5.1 JP5.3 Q1.2 Q2.3 Q5.2 R2.3 R81.2 U1.4 U2.22 U2.53 U2.63 U3.23 U3.25 U4.2 U4.4 U6.5 U6.6 U6.9 U8.12 U9.4 U9.26 X2.5 X2.G1 X2.G2
I2C_SCL: J2.13 R10.1 U1.6 U2.25
I2C_SDA: J2.11 R11.1 U1.5 U2.26
INT_DTMF: U2.6 U6.15
INT_EXP: J2.18 R79.1 U2.27
INT_ISD: R69.1 U2.7 U9.25
INT_MX828: R50.2 U2.28 U8.7
INT_RAC: R70.1 U2.9 U9.24
LCD_BKLITE: R9.1 U2.1
LCD_E: J1.6 U2.41
LCD_RS: J1.4 U2.40
LCD_RW: J1.5 U2.42
LED_PWR: R8.1 U2.43
MIX_BUSS: C51.1 R51.2 R59.2 R64.2 R72.1 R76.2
MIX_INSERT: C47.1 J2.4 R16.1
MUTE_AUX: U2.18 U7.7
MUTE_RX: U2.19 U7.3
N$1: L1.1 X1.1
N$2: C8.1 U2.62
N$3: C45.1 R82.2
N$4: C39.2 R26.2
N$5: C58.1 R62.1 U7.6
N$6: R63.2 R64.1
N$7: R65.2 R66.2
N$8: C63.2 U9.16
N$9: JP5.2 R12.2
N$10: C56.+ U8.11
N$11: C52.1 R83.2
N$12: JP4.1 R42.2
N$13: C23.1 L4.1 S1.3
N$14: L1.2 X1.2
N$15: C59.1 C60.1 R65.1 R67.1 TP8.TP
N$16: U6.7 Y2.2
N$17: U6.8 Y2.1
N$18: U6.1 U6.4
N$19: C24.1 D6.A L4.2
N$20: U1.1 Y4.2
N$21: U1.2 Y4.1
N$22: C61.1 R68.2
N$23: R75.2 R76.1
N$24: C65.1 R73.1 R77.2 U10.12
N$25: C64.2 R75.3
N$26: C40.2 R41.2 R45.2 U6.2
N$27: C41.2 JP4.3
N$28: C40.1 R41.1 U6.3
N$29: C30.1 R32.2 U6.17
N$30: C7.1 U2.24 Y1.1
N$31: JP5.4 R14.2
N$32: R32.1 U6.16
N$33: C59.2 U9.17
N$34: C12.2 U3.3
N$35: C44.2 R48.1
N$36: C11.2 U3.27
N$37: C64.1 U9.13
N$38: C6.1 U2.23 Y1.2
N$39: C13.1 U3.1
N$40: C43.2 R45.1
N$41: C55.+ U8.10
N$42: C48.2 R56.1
N$43: R30.2 R36.2 U5.6 U5.7
N$44: C10.1 U3.28
N$45: C13.2 U3.2
N$46: C10.2 U3.24
N$47: C31.1 R27.2
N$48: C44.1 R46.1 U7.2
N$49: C61.2 C62.1 R71.3
N$50: R71.2 R72.2
N$52: C53.1 R55.2 U8.2 Y3.1
N$53: C54.1 R55.1 U8.1 Y3.2
N$54: C49.2 R54.2 U8.19
N$55: R53.2 R56.2 R83.1 U10.7
N$56: C39.1 R43.2
N$57: C46.2 JP4.2 R43.1 R47.2 U8.14
N$58: C57.1 U8.13
N$59: C41.1 C46.1 R42.1 R47.1 U8.15
N$60: C48.1 R52.1 R60.2 U10.6
N$61: C58.2 R63.3 R66.3
N$62: C50.2 R59.1
N$63: B1.+ U1.3
N$64: C32.2 C33.1 R33.2
N$66: Q3.1 R15.2
N$67: Q2.1 R9.2
N$68: Q2.2 Q2.4 X5.2
N$69: R6.2 X5.1
N$70: R29.2 R34.1 U5.8
N$72: C36.2 R34.2 R39.1 U5.9
N$73: R57.1 U8.17
N$76: D2.C Q5.1 R19.1
N$77: C35.1 R30.1
N$78: PF1.2 S1.2
N$79: Q4.1 R17.2
N$80: R58.1 U8.21
N$81: C80.1 L1.3 PF1.1
N$82: C34.2 R24.2 U5.5
N$83: R52.2 R52.3 R53.1
N$84: C67.+ U9.14
N$85: C42.1 R44.1 R48.2 U10.9
N$86: C3.+ C79.+ L2.1 L3.1 U12.3
N$87: C42.2 R44.2 R82.1 U10.8
N$88: C33.2 C34.1 R36.1
N$89: C49.1 R54.1 R57.2 R58.2 U8.18
N$90: D11.K Q1.3
N$91: D11.A R7.2
N$92: Q1.1 R8.2
N$93: C47.2 R51.1
N$94: C29.2 C32.1 R25.2 U5.1
N$95: C35.2 C36.1 R38.1 U5.10
N$96: C37.1 C38.2 R29.1 U5.12
N$98: C29.1 R25.1 R28.2 U5.2
N$99: C31.2 R28.1
N$102: C37.2 R35.2 R40.1 U5.13
N$105: JP2.1 R1.1
N$106: C51.2 R60.1
N$107: JP2.3 R4.1
N$108: JP2.4 R3.1
N$109: C66.1 R74.1 R78.2 U10.3
N$111: R31.2 R35.1 U5.14
PA0: J1.7 U2.51
PA1: J1.8 U2.50
PA2: J1.9 U2.49
PA3: J1.10 U2.48
PA4: J1.11 U2.47
PA5: J1.12 U2.46
PA6: J1.13 U2.45
PA7: J1.14 U2.44
PTT: Q3.2 X3.1 X4.1
PTT_DRIVE: R15.1 U2.36
RESET: C5.1 D1.A JP1.6 JP2.5 R5.1 U2.20
RX_AUDIO_OUT: C43.1 J2.1 TP6.TP U8.16 U8.20
RX_AUDIO_RET: J2.2 U7.5
SPI_MISO: J2.14 U2.13 U8.5 U9.3
SPI_MOSI: J2.12 U2.12 U8.4 U9.2
SPI_SCK: J2.10 R4.2 U2.11 U8.3 U9.28
SPI_SS: J2.16 U2.33
SS_ISD: U2.16 U9.1
SS_MX828: U2.10 U8.6
TCK: JP1.1 RN1.1 U2.57
TDI: JP1.9 R12.1 RN1.4 U2.54
TDO: JP1.3 R14.1 RN1.3 U2.55
TMS: JP1.5 RN1.2 U2.56
TX_AUDIO: C52.2 J2.5 R61.2 X3.7 X4.7
TX_TONE_OUT: C50.1 TP5.TP U8.23
VBATT: C20.1 D7.C R21.1 R23.2 U2.59
VEE_LCD: J1.3 R2.2
VREF: R24.1 U5.3 U10.5 U10.10 U10.13 U10.14
VSQL: C78.+ D10.C R31.1 R37.1 TP3.TP U2.61 U8.9
VTEMP: C19.1 R20.1 R22.2 U2.60
XADC: J2.20 U2.58

## Tracks (layer width: path | path; a pad name or v marks a point on that pad's centre or on a via)
+2V5  (via drill 0.41)
  Top 0.254: U10.1 U10.2 121.28,5.4 120.97,5.71 120.97,6.06 | v120.97,6.67 120.97,6.06 | R46.2 R62.2 R16.2 112.05,13.65 | v111.44,13.65 112.05,13.65 | 112.05,13.65 111.57,13.9 v111.44,13.65 | 112.05,13.65 111.57,13.4 v111.44,13.65 | 120.97,6.06 121.22,6.54 v120.97,6.67 | 120.97,6.06 120.72,6.54 v120.97,6.67
  Bottom 0.254: 120.36,6.67 118.11,6.67 117.79,6.98 117.79,8.89 117.47,9.21 112.08,9.21 111.44,9.84 111.44,13.04 | 120.36,6.67 v120.97,6.67 | 111.44,13.04 v111.44,13.65 | 111.44,13.04 111.69,13.52 v111.44,13.65 | 111.44,13.04 111.19,13.52 v111.44,13.65 | 120.36,6.67 120.84,6.42 v120.97,6.67 | 120.36,6.67 120.84,6.92 v120.97,6.67
+3V3  (via drill 0.41, 0.61)
  Top 0.254: 108.58,51.59 TP2.TP
  Top 0.406: 121.21,46.6 120.97,46.6 120.97,46 | v120.97,45.08 120.97,46 | 120.97,46 120.68,45.19 v120.97,45.08 | 120.97,46 121.25,45.19 v120.97,45.08
  Top 0.61: 121.21,46.6 U4.1 | v108.58,49.85 108.58,50.76 | 108.58,50.76 108.58,51.59 | 108.58,50.76 108.39,49.89 v108.58,49.85 | 108.58,50.76 108.78,49.89 v108.58,49.85
  Top 0.813: C21.+
  Top 1.016: v108.58,49.85 C21.+ v113.35,49.85
  SUPPLY 0.61: v113.35,49.85 114.26,49.85 | 114.26,49.85 120.33,49.85 120.97,49.21 120.97,46 | 120.97,46 v120.97,45.08 | v117.47,29.69 112.71,29.69 111.76,30.64 111.76,49.21 112.39,49.85 112.43,49.85 | 108.58,48.93 108.58,46.67 109.54,45.72 109.54,34.61 107.63,32.7 v107.63,30.8 | 108.58,48.93 v108.58,49.85 | v113.35,49.85 112.43,49.85 | 114.26,49.85 113.39,50.05 v113.35,49.85 | 114.26,49.85 113.39,49.65 v113.35,49.85 | 112.43,49.85 113.3,49.65 v113.35,49.85 | 112.43,49.85 113.3,50.05 v113.35,49.85 | 108.58,48.93 108.78,49.8 v108.58,49.85 | 108.58,48.93 108.39,49.8 v108.58,49.85 | 120.97,46 120.77,45.13 v120.97,45.08 | 120.97,46 121.17,45.13 v120.97,45.08
  pour Top (isolate 0.406, no thermals): 115.57,30.16 116.2,30.8 117.47,30.8 118.43,31.75 118.43,34.61 119.06,34.61 119.06,32.07 119.38,31.75 120.65,31.75 120.97,31.43 120.97,29.21 115.57,29.21
  pour Top (isolate 0.305, no thermals): 107,34.61 107.63,34.61 107.63,32.07 107.95,31.75 109.22,31.75 109.54,31.43 109.54,29.21 104.14,29.21 104.14,30.96 106.68,30.96 107,31.27
+5V  (via drill 0.41, 0.61)
  Top 0.178: R69.2 111.6,27.62 111.44,27.78 R70.2 110.49,27.62 110.33,27.78 110.33,30.19 | R18.2 62.23,44.16 | 62.23,44.16 v62.23,44.77 | 110.33,30.19 v110.33,30.8 | C11.1 32.09,13.97 | 32.09,13.97 v32.7,13.97 | U3.22 27.65,11.11 | v28.26,11.11 27.65,11.11 | 62.23,44.16 62.5,44.6 v62.23,44.77 | 62.23,44.16 61.96,44.6 v62.23,44.77 | 27.65,11.11 28.09,10.84 v28.26,11.11 | 27.65,11.11 28.09,11.38 v28.26,11.11 | 110.33,30.19 110.6,30.63 v110.33,30.8 | 110.33,30.19 110.06,30.63 v110.33,30.8 | 32.09,13.97 32.54,13.7 v32.7,13.97 | 32.09,13.97 32.54,14.24 v32.7,13.97
  Top 0.254: R11.2 | R11.2 | R11.2 49.87,51.12 | 49.87,51.12 v50.48,51.12 | R10.2 49.87,53.02 | 49.87,53.02 v50.48,53.02 | C72.1 99.06,31.14 | 99.06,31.14 v99.06,31.75 | v99.06,31.75 99.06,32.36 | 99.06,32.36 U8.24 | C74.+ 81.92,30.16 81.92,31.46 | 81.92,31.46 v81.92,32.07 | 77.47,26.96 C73.1 C30.2 TP1.TP | 77.47,26.96 v77.47,26.35 | R20.2 61.89,11.11 | 61.89,11.11 v61.28,11.11 | v46.04,54.93 46.65,54.93 | 46.65,54.93 C9.1 | U1.8 45.43,54.93 | 45.43,54.93 v46.04,54.93 | R74.2 133.06,4.13 | 133.06,4.13 v133.67,4.13 | R79.2 40.64,40.96 40.01,41.59 39.97,41.59 | v39.05,41.59 39.97,41.59 | U6.18 80.64,33.65 81.6,33.65 81.92,33.34 81.92,32.68 | v81.92,32.07 81.92,32.68 | U3.26 27.87,13.72 28.26,13.33 28.26,11.72 | 28.26,11.72 v28.26,11.11 | RN1.5 RN1.6 RN1.7 RN1.8 42.41,11.43 | 42.41,11.43 v43.02,11.43 | 49.87,51.12 50.35,50.87 v50.48,51.12 | 49.87,51.12 50.35,51.37 v50.48,51.12 | 49.87,53.02 50.35,52.77 v50.48,53.02 | 49.87,53.02 50.35,53.27 v50.48,53.02 | 99.06,31.14 99.31,31.62 v99.06,31.75 | 99.06,31.14 98.81,31.62 v99.06,31.75 | 99.06,32.36 98.81,31.88 v99.06,31.75 | 99.06,32.36 99.31,31.88 v99.06,31.75 | 77.47,26.96 77.22,26.48 v77.47,26.35 | 77.47,26.96 77.72,26.48 v77.47,26.35 | 81.92,31.46 82.16,31.94 v81.92,32.07 | 81.92,31.46 81.67,31.94 v81.92,32.07 | 81.92,32.68 81.67,32.2 v81.92,32.07 | 81.92,32.68 82.16,32.2 v81.92,32.07 | 61.89,11.11 61.41,11.36 v61.28,11.11 | 61.89,11.11 61.41,10.86 v61.28,11.11 | 28.26,11.72 28.01,11.24 v28.26,11.11 | 28.26,11.72 28.51,11.24 v28.26,11.11 | 46.65,54.93 46.17,55.18 v46.04,54.93 | 46.65,54.93 46.17,54.68 v46.04,54.93 | 45.43,54.93 45.91,54.68 v46.04,54.93 | 45.43,54.93 45.91,55.18 v46.04,54.93 | 133.06,4.13 133.54,3.88 v133.67,4.13
  Top 0.254: 133.06,4.13 133.54,4.38 v133.67,4.13 | 39.97,41.59 39.21,41.94 v39.05,41.59 | 39.97,41.59 39.21,41.25 v39.05,41.59 | 42.41,11.43 42.89,11.18 v43.02,11.43 | 42.41,11.43 42.89,11.68 v43.02,11.43
  Top 0.406: R50.1 65.43,32.38 | 65.43,32.38 v66.04,32.38 | v28.26,11.11 28.87,11.11 | 28.87,11.11 C22.1 | 65.43,32.38 65.97,32.19 v66.04,32.38 | 65.43,32.38 65.97,32.58 v66.04,32.38 | 28.87,11.11 28.32,11.3 v28.26,11.11 | 28.87,11.11 28.32,10.92 v28.26,11.11
  Top 0.61: v20.8,33.65 R7.1
  Top 0.813: R6.1 v39.05,41.59
  Top 1.27: L3.2 v71.44,16.83
  other vias: 87.63,57.47 89.53,59.05 87.63,59.05 89.53,57.47
  pour SUPPLY (isolate 0.305, rank 2, no thermals): 0.95,75.88 0.95,52.7 5.71,52.7 6.03,52.39 6.03,49.85 5.71,49.53 0.95,49.53 0.95,0.95 133.99,0.95 133.99,4.13 arc90 133.67,4.44 arc90 133.35,4.13 133.35,2.86 arc-90 132.08,1.59 76.2,1.59 arc-90 74.93,2.86 74.93,23.81 arc-90 76.2,25.08 102.87,25.08 arc90 103.5,25.72 103.5,26.99 arc-90 104.78,28.26 121.92,28.26 arc90 122.56,28.89 122.56,33.02 arc-90 123.83,34.29 124.78,34.29 arc90 125.41,34.92 arc90 124.78,35.56 123.83,35.56 arc-90 122.56,36.83 122.56,71.12 arc90 121.92,71.75 53.34,71.75 arc90 52.7,71.12 52.7,59.69 arc-90 51.44,58.42 48.26,58.42 arc-90 46.99,59.69 46.99,75.88
  pour Top (isolate 0.61, rank 2, no thermals): 66.67,65.09 66.67,61.59 67.94,60.32 95.25,60.32 95.25,56.51 75.56,56.51 75.56,57.78 68.26,57.78 68.26,56.83 62.87,56.83 62.87,65.09
+12V  (via drill 0.41, 0.61)
  Top 0.254: v111.44,7.3 112.05,7.3 | 112.05,7.3 R73.2 | v118.11,23.81 118.72,23.81 | 118.72,23.81 119.38,23.81 | 119.38,23.81 | 119.38,23.81 C77.1 | U7.8 117.5,23.81 | 117.5,23.81 v118.11,23.81 | 112.05,7.3 111.57,7.55 v111.44,7.3 | 112.05,7.3 111.57,7.05 v111.44,7.3 | 118.72,23.81 118.24,24.06 v118.11,23.81 | 118.72,23.81 118.24,23.56 v118.11,23.81 | 117.5,23.81 117.98,23.56 v118.11,23.81 | 117.5,23.81 117.98,24.06 v118.11,23.81
  Top 0.406: v120.97,7.94 121.58,7.94 | 121.58,7.94 U10.4 124.46,7.94 125.09,7.3 C75.1 | 94.96,13.65 C76.1 93.98,13.65 93.98,12.38 93.03,11.43 93.03,8.57 93.66,7.94 U5.4 | 94.96,13.65 v95.57,13.65 | U4.3 121.28,49.6 121.28,51.75 121.76,52.23 122.91,52.23 | 122.91,52.23 v123.83,52.23 | 121.58,7.94 121.03,8.13 v120.97,7.94 | 121.58,7.94 121.03,7.75 v120.97,7.94 | 94.96,13.65 95.5,13.46 v95.57,13.65 | 94.96,13.65 95.5,13.84 v95.57,13.65 | 122.91,52.23 123.72,51.94 v123.83,52.23 | 122.91,52.23 123.72,52.52 v123.83,52.23
  other vias: 50.01,63.18 50.01,61.59 50.01,60.01
  pour Top (isolate 0.61, rank 5, no thermals): 27.3,61.59 27.3,57.78 59.05,57.78 59.69,57.15 59.69,54.61 60.96,54.61 60.96,67.94 61.59,68.58 66.36,68.58 66.36,69.85 60.01,69.85 58.74,68.58 58.74,64.77 58.1,64.13 41.91,64.13 41.27,64.77 41.27,69.85 40.32,70.8 36.2,70.8 36.2,69.85 39.05,69.85 39.37,69.53 39.37,62.23 38.73,61.59
  pour SUPPLY (isolate 0.305, rank 3, no thermals): 47.62,75.88 47.62,59.69 arc90 48.26,59.05 51.44,59.05 arc90 52.07,59.69 52.07,71.12 arc-90 53.34,72.39 121.92,72.39 arc-90 123.19,71.12 123.19,36.83 arc90 123.83,36.19 124.78,36.19 arc-90 126.05,34.92 arc-90 124.78,33.65 123.83,33.65 arc90 123.19,33.02 123.19,28.89 arc-90 121.92,27.62 104.78,27.62 arc90 104.14,26.99 104.14,25.72 arc-90 102.87,24.45 76.2,24.45 arc90 75.56,23.81 75.56,2.86 arc90 76.2,2.22 132.08,2.22 arc90 132.72,2.86 132.72,4.13 arc-90 133.67,5.08 arc-90 134.62,4.13 134.62,0.95 153.35,0.95 153.35,75.88
AGND  (via drill 0.41, 0.61)
  Top 0.178: 37.31,22.07 U12.2 | v34.61,26.99
  Top 0.254: C57.2 84.75,27.62 | 84.75,27.62 v84.14,27.62 | v111.44,4.13 112.05,4.13 | 112.05,4.13 R77.1 | U7.4 109.83,20 | 109.83,20 v109.22,20 | C66.2 137.5,4.13 | 137.5,4.13 v138.11,4.13 | R78.1 125.39,4.13 | 125.39,4.13 v124.78,4.13 | C77.2 122.26,23.49 | 122.26,23.49 v122.87,23.49 | C65.2 110.83,4.13 | 110.83,4.13 v111.44,4.13 | C76.2 92.71,13.33 | U5.11 92.39,7.94 92.87,7.46 92.87,7.28 | 92.87,7.28 v92.87,6.67 | C8.2 35.22,26.99 | 35.22,26.99 v34.61,26.99 | R33.1 106.39,16.83 | 106.39,16.83 v107,16.83 | R38.2 79.08,10.48 | 79.08,10.48 v79.69,10.48 | C38.1 87.97,7.3 | 87.97,7.3 v88.58,7.3 | R39.2 84.75,10.48 | 84.75,10.48 v84.14,10.48 | R40.2 80.3,4.13 | 80.3,4.13 v79.69,4.13 | D10.A 87.02,20.48 | 87.02,20.48 v87.63,20.48 | C19.2 70.19,11.11 | 70.19,11.11 v70.8,11.11 | C19.2 C19.2 arc-270 C19.2 | C19.2 68.9,13.65 R22.1 | R66.1 140.52,25.53 141.08,24.97 141.29,24.76 141.29,23.49 141.6,23.18 C60.2 R67.2 | C78.- 80.03,20.48 | 80.03,20.48 v80.64,20.48 | R71.1 149.78,4.72 149.19,4.13 C62.2 | R37.2 87.63,16.83 87.63,19.87 | v87.63,20.48 87.63,19.87 | 84.75,27.62 84.27,27.87 v84.14,27.62 | 84.75,27.62 84.27,27.37 v84.14,27.62 | 112.05,4.13 111.57,4.38 v111.44,4.13 | 112.05,4.13 111.57,3.88 v111.44,4.13 | 110.83,4.13 111.31,3.88 v111.44,4.13 | 110.83,4.13 111.31,4.38 v111.44,4.13 | 70.19,11.11 70.67,10.86 v70.8,11.11 | 70.19,11.11 70.67,11.36 v70.8,11.11 | 109.83,20 109.35,20.25 v109.22,20 | 109.83,20 109.35,19.75 v109.22,20 | 137.5,4.13 137.98,3.88 v138.11,4.13 | 137.5,4.13 137.98,4.38 v138.11,4.13 | 125.39,4.13 124.91,4.38 v124.78,4.13 | 125.39,4.13 124.91,3.88 v124.78,4.13 | 122.26,23.49 122.74,23.25 v122.87,23.49 | 122.26,23.49 122.74,23.74 v122.87,23.49
  Top 0.254: 92.87,7.28 92.62,6.8 v92.87,6.67 | 92.87,7.28 93.12,6.8 v92.87,6.67 | 35.22,26.99 34.74,27.24 v34.61,26.99 | 35.22,26.99 34.74,26.74 v34.61,26.99 | 106.39,16.83 106.87,16.58 v107,16.83 | 106.39,16.83 106.87,17.08 v107,16.83 | 79.08,10.48 79.56,10.23 v79.69,10.48 | 79.08,10.48 79.56,10.73 v79.69,10.48 | 87.97,7.3 88.45,7.05 v88.58,7.3 | 87.97,7.3 88.45,7.55 v88.58,7.3 | 80.3,4.13 79.82,4.38 v79.69,4.13 | 80.3,4.13 79.82,3.88 v79.69,4.13 | 84.75,10.48 84.27,10.73 v84.14,10.48 | 84.75,10.48 84.27,10.23 v84.14,10.48 | 87.02,20.48 87.5,20.23 v87.63,20.48 | 87.02,20.48 87.5,20.73 v87.63,20.48 | 87.63,19.87 87.88,20.35 v87.63,20.48 | 87.63,19.87 87.38,20.35 v87.63,20.48 | 80.03,20.48 80.52,20.23 v80.64,20.48 | 80.03,20.48 80.52,20.73 v80.64,20.48
  Top 0.406: C56.- 83.82,50.82 | 83.82,50.82 v83.82,51.43 | U9.23 113.67,32.36 | 113.67,32.36 v113.67,31.75 | C63.1 102.23,26.96 | 102.23,26.96 v102.23,26.35 | v115.89,7.94 116.5,7.94 | 116.5,7.94 U10.11 | v91.12,13.65 91.73,13.65 | 91.73,13.65 C76.2 | C75.2 128.61,7.3 | 128.61,7.3 v129.22,7.3 | C55.- 87.63,50.82 | 87.63,50.82 v87.63,51.43 | R23.1 C20.2 62.52,54.93 | v61.91,54.93 62.52,54.93 | D7.A 57.81,55.88 | 57.81,55.88 v58.42,55.88 | 83.82,50.82 84.01,51.37 v83.82,51.43 | 83.82,50.82 83.63,51.37 v83.82,51.43 | 113.67,32.36 113.47,31.82 v113.67,31.75 | 113.67,32.36 113.86,31.82 v113.67,31.75 | 102.23,26.96 102.04,26.42 v102.23,26.35 | 102.23,26.96 102.43,26.42 v102.23,26.35 | 116.5,7.94 115.95,8.13 v115.89,7.94 | 116.5,7.94 115.95,7.75 v115.89,7.94 | 91.73,13.65 91.19,13.84 v91.12,13.65 | 91.73,13.65 91.19,13.46 v91.12,13.65 | 128.61,7.3 129.16,7.11 v129.22,7.3 | 128.61,7.3 129.16,7.49 v129.22,7.3 | 87.63,50.82 87.82,51.37 v87.63,51.43 | 87.63,50.82 87.44,51.37 v87.63,51.43 | 62.52,54.93 61.98,55.12 v61.91,54.93 | 62.52,54.93 61.98,54.74 v61.91,54.93 | 57.81,55.88 58.35,55.69 v58.42,55.88 | 57.81,55.88 58.35,56.07 v58.42,55.88
  Top 0.508: 141.08,24.97 140.97,25.63 R66.1 140.42,25.11 141.08,24.97 | 149.78,4.72 150.61,4.89 R71.1 149.95,5.55 149.78,4.72
  Top 0.61: C4.1 v34.61,24.92 34.61,22.54 | v42.86,56.83 52.39,56.83 53.34,55.88 D7.A | 34.61,22.54 C79.- | 37.31,22.07 34.61,22.07 34.61,22.54 | C79.- 34.61,22.54 | C79.-
  Bottom 0.406: 61.3,54.93 60.96,54.93 60.01,55.88 59.03,55.88 | 61.3,54.93 v61.91,54.93 | v58.42,55.88 59.03,55.88 | 61.3,54.93 61.84,54.74 v61.91,54.93 | 61.3,54.93 61.84,55.12 v61.91,54.93 | 59.03,55.88 58.49,56.07 v58.42,55.88 | 59.03,55.88 58.49,55.69 v58.42,55.88
  other vias: 106.68,44.77 117.47,26.67 140.97,49.85 140.97,37.46 134.94,28.57 128.27,20.32 129.86,31.11 152.4,31.75 152.4,2.54 99.38,69.21 99.38,67.94 70.8,6.67 70.8,2.22 109.22,25.72
  pour GROUND (isolate 0.305, rank 3, no thermals): 81.28,60.64 81.28,48.26 arc90 81.92,47.62 104.14,47.62 arc-90 105.41,46.35 105.41,44.45 arc90 106.05,43.81 112.08,43.81 arc90 112.71,44.45 112.71,46.51 arc-90 113.98,47.78 121.6,47.78 arc-90 122.87,46.51 122.87,34.29 arc90 123.51,33.65 124.78,33.65 arc-90 126.05,32.38 126.05,32.38 arc-90 124.78,31.11 123.51,31.11 arc90 122.87,30.48 122.87,28.89 arc-90 121.6,27.62 115.57,27.62 arc-90 114.3,28.89 114.3,31.59 arc90 113.67,32.23 arc90 113.03,31.59 113.03,28.1 arc-90 111.76,26.83 102.23,26.83 arc90 101.6,26.19 101.6,25.72 arc-90 100.33,24.45 86.04,24.45 arc-90 84.77,25.72 84.77,27.62 arc180 83.5,27.62 83.5,25.72 arc-90 82.23,24.45 76.36,24.45 arc90 75.72,23.81 75.72,13.02 arc-90 74.45,11.75 70.48,11.75 arc90 69.85,11.11 69.85,0.95 153.35,0.95 153.35,75.88 93.03,75.88 93.03,62.55 arc-90 91.76,61.28 81.92,61.28 arc90 81.28,60.64
  pour Top (isolate 0.61, rank 3, no thermals): 121.28,50.8 121.28,38.42 122.56,37.15 122.56,18.1 138.11,18.1 138.11,28.42 142.24,28.42 142.24,50.8 141.6,51.43 140.34,51.43 139.7,52.07 139.7,59.69 140.34,60.32 144.15,60.32 147,57.47 147,49.21 152.08,49.21 152.72,48.58 152.72,32.7 151.76,32.07 151.76,31.43 152.72,30.48 152.72,4.13 150.81,2.22 74.93,2.22 73.98,3.17 73.98,13.97 72.71,13.97 72.39,14.29 72.39,15.24 70.17,15.24 70.17,1.59 153.35,1.59 153.35,75.25 144.3,75.25 144.3,61.91 143.99,61.59 133.67,61.59 133.35,61.28 133.35,50.8
  pour Bottom (isolate 0.61, rank 2, no thermals): 34.92,75.25 34.92,28.26 33.97,27.3 33.97,23.34 34.29,23.02 38.42,23.02 38.42,35.24 42.23,35.24 42.23,54.61 44.77,57.15 49.53,57.15 58.42,66.04 116.84,66.04 120.65,62.23 120.65,51.12 128.27,51.12 128.27,36.19 127.95,35.88 126.68,35.88 126.36,35.56 126.36,34.29 126.68,33.97 127.95,33.97 128.27,33.65 128.27,28.26 126.36,28.26 126.36,25.08 123.19,25.08 122.24,24.13 122.24,19.37 129.54,19.37 130.49,18.41 136.21,18.41 136.21,16.19 142.88,16.19 142.88,8.25 139.06,8.25 139.06,7.3 129.86,7.3 129.54,7.62 128.91,7.62 128.59,7.3 122.56,7.3 120.02,4.76 110.49,4.76 109.54,5.71 105.41,5.71 102.87,3.17 80.96,3.17 78.11,6.03 78.11,8.57 70.17,8.57 70.17,1.59 153.35,1.59 153.35,75.25
  pour Top (isolate 0.61, no thermals): 104.78,47.31 107.31,47.31 107.63,46.99 107.63,42.23 105.73,42.23 105.73,44.77 105.41,45.08 105.09,45.08 104.78,45.4
  pour Top (isolate 0.406, rank 2, no thermals): 115.25,27.94 120.97,27.94 120.97,25.72 113.35,25.72 112.71,25.08 107,25.08 107,25.4 107.95,26.35 114.94,26.35 115.25,26.67
  pour Top (no thermals): 97.47,69.21 98.11,69.85 100.01,69.85 100.01,67.31 98.11,67.31 97.47,67.94
AUX_AUDIO  (via drill 0.41)
  Top 0.254: X3.8 142.88,53.34 142.88,43.81 | v142.88,21.59 142.88,22.2 | 142.88,22.2 142.88,35.58 | 142.88,35.58 v142.88,36.19 | v142.88,36.19 142.88,36.8 | 142.88,36.8 142.88,43.81 | C45.2 124.17,13.65 | 124.17,13.65 v124.78,13.65 | 142.88,43.81 R49.2 | 142.88,35.58 143.12,36.07 v142.88,36.19 | 142.88,35.58 142.63,36.07 v142.88,36.19 | 142.88,36.8 142.63,36.32 v142.88,36.19 | 142.88,36.8 143.12,36.32 v142.88,36.19 | 142.88,22.2 142.63,21.72 v142.88,21.59 | 142.88,22.2 143.12,21.72 v142.88,21.59 | 124.17,13.65 124.65,13.4 v124.78,13.65 | 124.17,13.65 124.65,13.9 v124.78,13.65
  Bottom 0.254: 142.88,20.98 142.88,15.87 142.24,15.24 127.32,15.24 125.73,13.65 125.39,13.65 | 142.88,20.98 v142.88,21.59 | v124.78,13.65 125.39,13.65 | J2.3 128.33,29.84 130.81,29.84 137.16,36.19 142.26,36.19 | v142.88,36.19 142.26,36.19 | 142.26,36.19 142.75,35.95 v142.88,36.19 | 142.26,36.19 142.75,36.44 v142.88,36.19 | 142.88,20.98 143.12,21.46 v142.88,21.59 | 142.88,20.98 142.63,21.46 v142.88,21.59 | 125.39,13.65 124.91,13.9 v124.78,13.65 | 125.39,13.65 124.91,13.4 v124.78,13.65
  Bottom 0.508: 128.33,29.84 127.62,30.31 J2.3 127.62,29.38 128.33,29.84
  Bottom 0.61: X3.8 X4.8
AUX_AUDIO_OUT  (via drill 0.41)
  Top 0.254: v96.52,31.75 96.52,32.36 | 96.52,32.36 U8.22 | v109.22,23.81 109.83,23.81 | 109.83,23.81 U7.1 | v109.22,23.81 108.61,23.81 | 108.61,23.81 TP4.TP | 96.52,32.36 96.27,31.88 v96.52,31.75 | 96.52,32.36 96.77,31.88 v96.52,31.75 | 109.83,23.81 109.35,24.06 v109.22,23.81 | 109.83,23.81 109.35,23.56 v109.22,23.81 | 108.61,23.81 109.09,23.56 v109.22,23.81 | 108.61,23.81 109.09,24.06 v109.22,23.81
  Bottom 0.254: 96.52,31.14 96.52,24.76 97.47,23.81 108.61,23.81 | 96.52,31.14 v96.52,31.75 | 108.61,23.81 v109.22,23.81 | 96.52,31.14 96.77,31.62 v96.52,31.75 | 96.52,31.14 96.27,31.62 v96.52,31.75 | 108.61,23.81 109.09,23.56 v109.22,23.81 | 108.61,23.81 109.09,24.06 v109.22,23.81
AVR_5V  (via drill 0.41, 0.61)
  Top 0.178: D1.C C1.1 | U2.52 40.11,31.22 39.85,30.96 C2.1
  Top 0.254: R5.2 C1.1 60.96,18.41 60.64,18.73 60.64,20.95 | 57.01,24.84 U2.21 | U2.52 42.34,31.22 42.59,31.48 | v43.02,31.91 42.59,31.48 | 42.59,31.48 43.11,31.64 v43.02,31.91 | 42.59,31.48 42.76,31.99 v43.02,31.91
  Top 0.406: R5.2 59.05,16.83 | v55.56,24.84 56.17,24.84 | 56.17,24.84 57.01,24.84 | 56.17,24.84 55.63,25.04 v55.56,24.84 | 56.17,24.84 55.63,24.65 v55.56,24.84
  Top 0.813: L2.2 60.64,20.95 v60.64,22.7
  SUPPLY 0.406: v60.64,22.7 59.73,22.7 | 59.73,22.7 56.2,22.7 55.56,23.34 55.56,24.23 | 55.56,24.23 v55.56,24.84 | v55.56,24.84 54.95,24.84 | 54.95,24.84 53.42,24.84 46.35,31.91 43.63,31.91 | 43.63,31.91 v43.02,31.91 | 59.73,22.7 60.54,22.41 v60.64,22.7 | 59.73,22.7 60.54,22.99 v60.64,22.7 | 55.56,24.23 55.75,24.78 v55.56,24.84 | 55.56,24.23 55.37,24.78 v55.56,24.84 | 54.95,24.84 55.49,24.65 v55.56,24.84 | 54.95,24.84 55.49,25.04 v55.56,24.84 | 43.63,31.91 43.09,32.1 v43.02,31.91 | 43.63,31.91 43.09,31.72 v43.02,31.91
AVR_REF
  Top 0.178: 39.21,21.75 U12.1
  Top 0.254: C4.2 37.78,23.49 38.1,23.18 38.89,23.18 39.21,22.86 39.21,21.75 | U2.64 41.41,21.75 39.21,21.75 | 39.21,21.75 | 39.21,21.75 U12.1
B_CTS
  Top 0.178: U3.6 19.34,11.77 19.05,12.06 7.62,12.06 6.67,13.02 6.67,17.46 6.87,17.67 7.08,17.67 X2.8
  Top 0.356: 7.08,17.67 7.67,17.16 X2.8 7.67,18.17 7.08,17.67
B_DCD
  Top 0.178: X2.1 11.88,24.59 12.72,24.59 13.49,23.81 13.49,20.32 13.81,20 21.59,20 22.86,18.73 22.86,11.27 22.06,10.47 U3.8
  Top 0.356: 11.88,24.59 11.29,25.09 X2.1 11.29,24.08 11.88,24.59
B_DSR
  Top 0.178: X2.6 9.11,23.2 12.36,23.2 13.02,22.54 13.02,20.16 13.65,19.53 21.43,19.53 22.38,18.57 22.38,11.75 21.76,11.12 U3.7
  Top 0.356: 9.11,23.2 8.53,23.7 X2.6 8.53,22.7 9.11,23.2
B_DTR  (via drill 0.41)
  Top 0.178: U3.10 18.29,9.17 18.1,9.37 18.1,10.03 | v18.1,10.64 18.1,10.03 | 18.1,10.03 18.37,10.47 v18.1,10.64 | 18.1,10.03 17.83,10.47 v18.1,10.64
  Bottom 0.178: X2.4 11.88,16.28 17.53,16.28 18.1,15.72 18.1,11.25 | 18.1,11.25 v18.1,10.64 | 18.1,11.25 17.83,10.8 v18.1,10.64 | 18.1,11.25 18.37,10.8 v18.1,10.64
  Bottom 0.356: 11.88,16.28 11.29,16.78 X2.4 11.29,15.78 11.88,16.28
B_RI
  Top 0.178: U3.4 19.58,13.07 19.05,12.54 12.7,12.54 12.38,12.86 12.38,14.6 12.09,14.9 9.11,14.9 X2.9
  Top 0.356: 9.11,14.9 8.53,15.4 X2.9 8.53,14.39 9.11,14.9
B_RTS
  Top 0.178: X2.7 7.08,20.43 6.46,20.43 5.71,19.68 5.71,12.7 7.3,11.11 16.83,11.11 17.14,10.79 17.14,8.89 17.52,8.52 U3.11
  Top 0.356: 7.08,20.43 7.67,19.93 X2.7 7.67,20.94 7.08,20.43
B_RXD
  Top 0.178: X2.2 11.88,21.82 12.15,21.82 12.54,21.43 12.54,20 13.49,19.05 21.27,19.05 21.91,18.41 21.91,12.7 21.63,12.42 U3.5
  Top 0.356: 11.88,21.82 11.29,22.32 X2.2 11.29,21.32 11.88,21.82
B_TXD
  Top 0.178: X2.3 9.85,19.05 6.67,19.05 6.19,18.57 6.19,12.86 7.46,11.59 18.73,11.59 19.05,11.27 19.05,10.16 19.39,9.82 U3.9
  Top 0.356: 9.85,19.05 10.44,18.55 X2.3 10.44,19.55 9.85,19.05
BEEP_PWM  (via drill 0.41)
  Top 0.178: v73.66,16.83 74.27,16.83 | 74.27,16.83 R68.1 | v73.66,16.83 73.66,16.22 | 73.66,16.22 TP7.TP | U2.15 54.41,18.93 55.24,18.1 55.24,17.91 | 55.24,17.91 v55.24,17.3 | 74.27,16.83 73.83,17.1 v73.66,16.83 | 74.27,16.83 73.83,16.56 v73.66,16.83 | 73.66,16.22 73.93,16.66 v73.66,16.83 | 73.66,16.22 73.39,16.66 v73.66,16.83 | 55.24,17.91 54.97,17.47 v55.24,17.3 | 55.24,17.91 55.52,17.47 v55.24,17.3
  Bottom 0.178: v55.24,17.3 55.85,17.3 | 55.85,17.3 66.99,17.3 68.26,18.57 73.34,18.57 73.66,18.26 73.66,17.44 | 73.66,17.44 v73.66,16.83 | 73.66,17.44 73.39,16.99 v73.66,16.83 | 73.66,17.44 73.93,16.99 v73.66,16.83 | 55.85,17.3 55.41,17.57 v55.24,17.3 | 55.85,17.3 55.41,17.03 v55.24,17.3
CGND  (via drill 0.61)
  Top 0.178: R13.2 111.12,53.97 110.81,54.29
  Bottom 0.61: X3.4 X4.4
  other vias: 94.3,69.21 94.3,67.94
  pour Top (isolate 0.61, rank 6, no thermals): 12.7,75.25 12.7,70.48 15.56,70.48 15.88,70.17 15.88,64.77 17.14,64.77 17.78,65.41 17.78,72.39 18.41,73.02 30.8,73.02 31.43,72.39 31.43,69.85 33.66,69.85 33.97,69.53 33.97,66.04 34.29,65.72 35.56,65.72 35.88,65.41 35.88,62.86 37.78,62.86 37.78,68.58 37.47,68.9 35.88,68.9 35.56,69.21 35.56,71.75 35.88,72.07 40.96,72.07 42.23,70.8 58.74,70.8 59.37,71.44 69.22,71.44 69.85,70.8 69.85,61.91 70.48,61.28 95.89,61.28 96.52,60.64 96.52,56.51 110.17,56.51 110.17,53.66 111.44,53.66 111.44,56.51 122.56,56.51 122.56,53.66 124.14,53.66 124.78,53.02 124.78,51.43 132.08,51.43 132.08,61.91 133.03,62.86 143.19,62.86 143.19,64.13 129.86,64.13 126.36,60.64 101.92,60.64 101.92,75.25
COM_CTS  (via drill 0.41)
  Top 0.178: U3.17 24.2,7.87 23.93,8.14 | v23.5,8.57 23.93,8.14 | U2.14 53.61,17.89 53.34,17.62 53.16,17.62 | 53.16,17.62 v52.55,17.62 | 23.93,8.14 23.8,8.65 v23.5,8.57 | 23.93,8.14 23.42,8.26 v23.5,8.57 | 53.16,17.62 52.71,17.89 v52.55,17.62 | 53.16,17.62 52.71,17.35 v52.55,17.62
  Bottom 0.178: 23.5,9.18 23.5,15.87 23.97,16.35 47.15,16.35 49.05,18.26 50.64,18.26 51.28,17.62 51.94,17.62 | 23.5,9.18 v23.5,8.57 | v52.55,17.62 51.94,17.62 | 23.5,9.18 23.22,8.74 v23.5,8.57 | 23.5,9.18 23.77,8.74 v23.5,8.57 | 51.94,17.62 52.38,17.35 v52.55,17.62 | 51.94,17.62 52.38,17.89 v52.55,17.62
COM_DCD  (via drill 0.41)
  Top 0.178: U2.8 48.81,18.18 49.1,17.89 | 49.1,17.89 v49.53,17.46 | v27.78,9.37 27.78,8.76 | 27.78,8.76 27.78,6.98 27.37,6.57 U3.15 | 49.1,17.89 49.22,17.39 v49.53,17.46 | 49.1,17.89 49.6,17.77 v49.53,17.46 | 27.78,8.76 28.05,9.2 v27.78,9.37 | 27.78,8.76 27.51,9.2 v27.78,9.37
  Bottom 0.178: v49.53,17.46 49.53,16.85 | 49.53,16.85 49.53,16.51 50.16,15.87 50.16,14.29 49.85,13.97 47.62,13.97 46.67,14.92 27.3,14.92 26.99,14.6 26.99,10.95 27.78,10.16 27.78,9.98 | 27.78,9.98 v27.78,9.37 | 49.53,16.85 49.8,17.3 v49.53,17.46 | 49.53,16.85 49.26,17.3 v49.53,17.46 | 27.78,9.98 27.51,9.53 v27.78,9.37 | 27.78,9.98 28.05,9.53 v27.78,9.37
COM_DSR  (via drill 0.41)